# Altium PCB modFOC-MCU.PcbDoc (part 1 of 2)
Units mm, origin at the board's own origin, x right, y up, seen from the top; angles counter-clockwise.
Board outline 53.34 x 55.88 mm, 4 copper layers (Top Layer, Mid Layer 1, Mid Layer 2, Bottom Layer), stack 1.587 mm thick; 106 components, 96 nets, 421 pads, 189 vias.
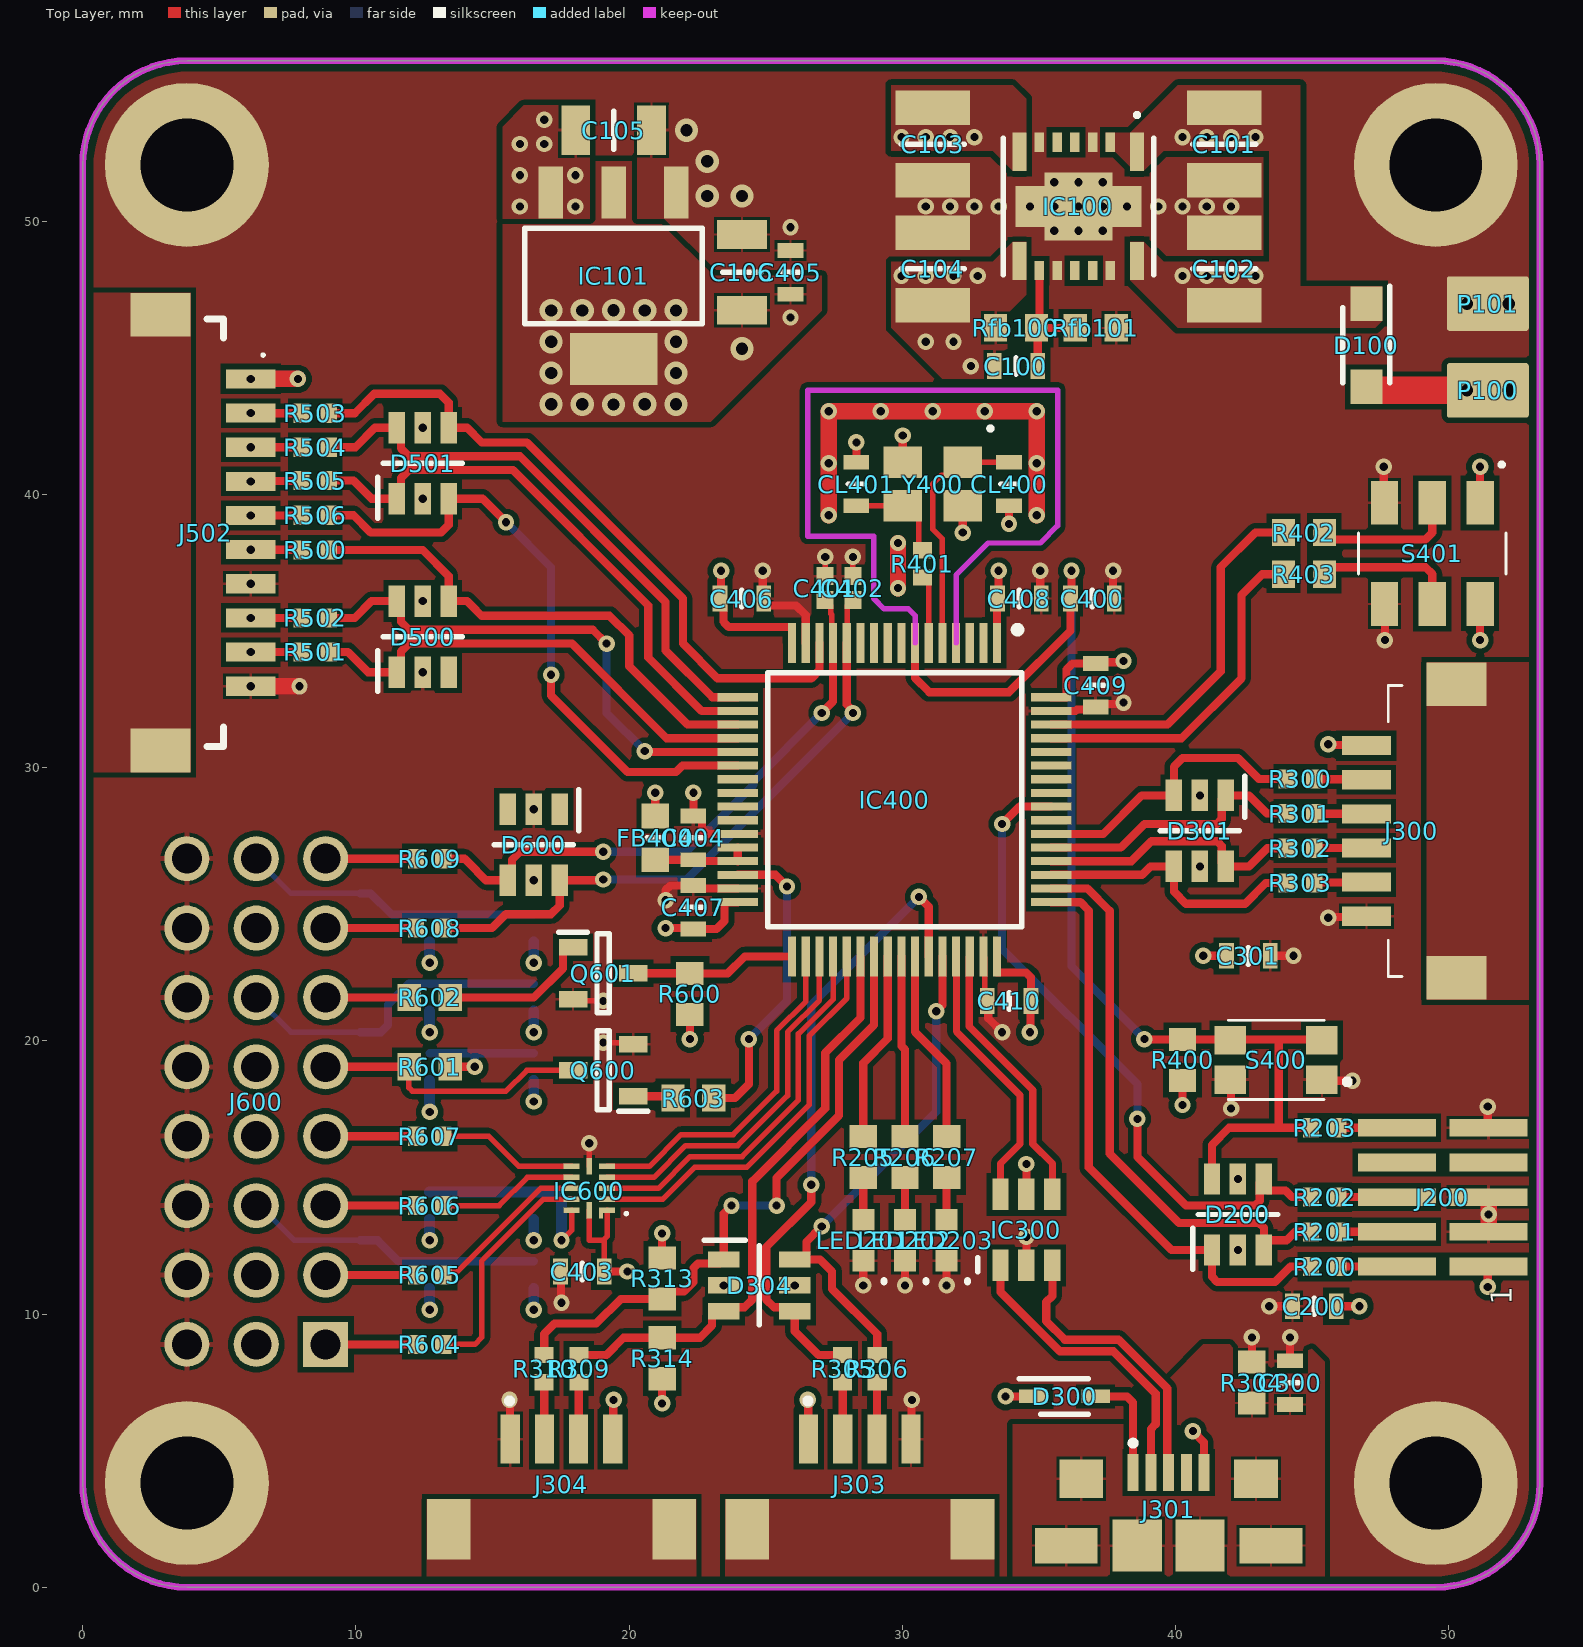
[diagram p0: Top Layer view]
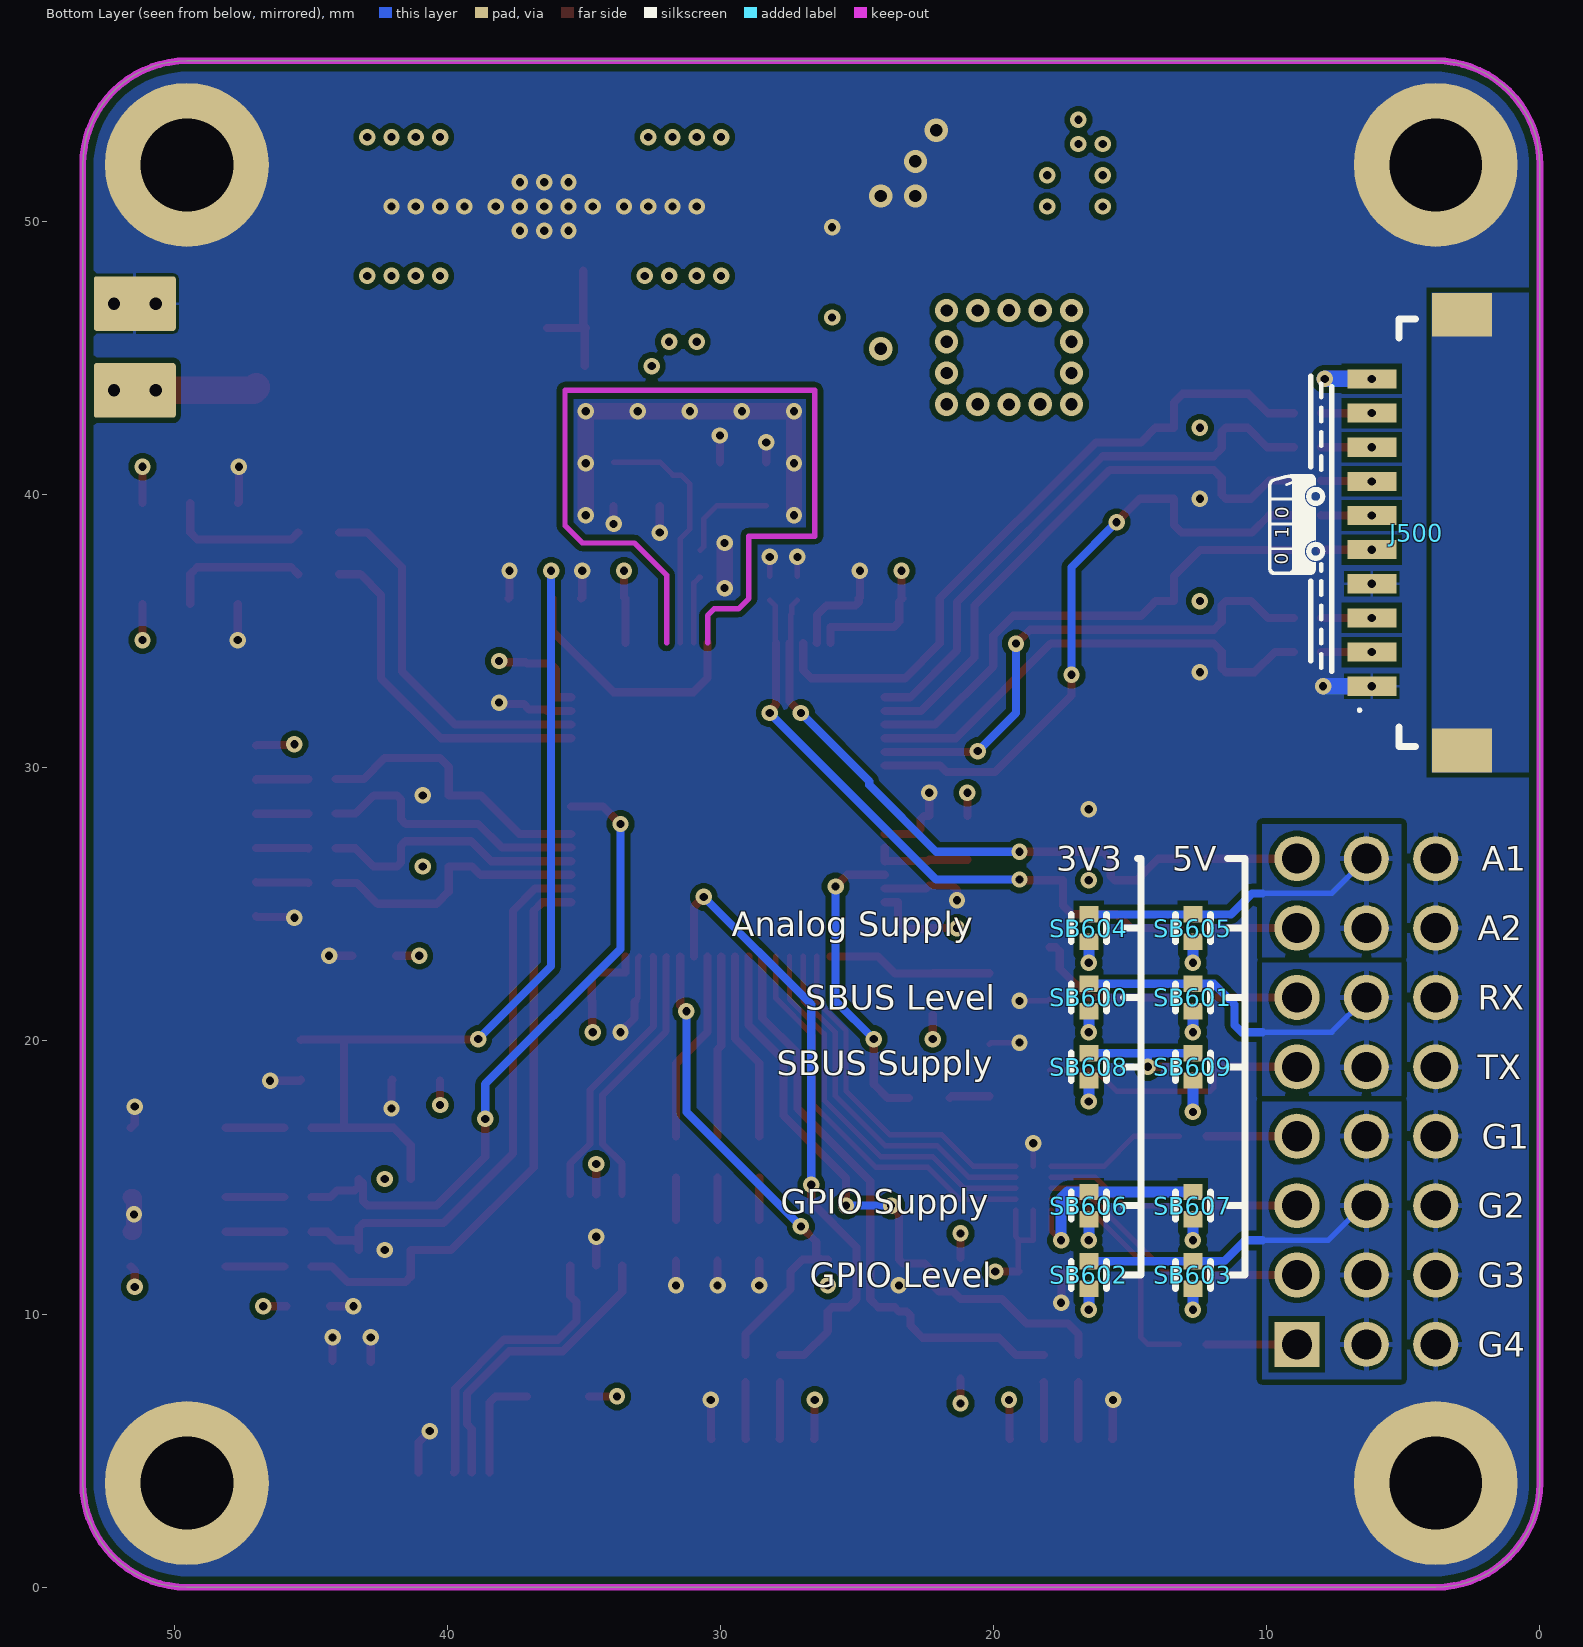
[diagram p1: Bottom Layer view, seen from below]
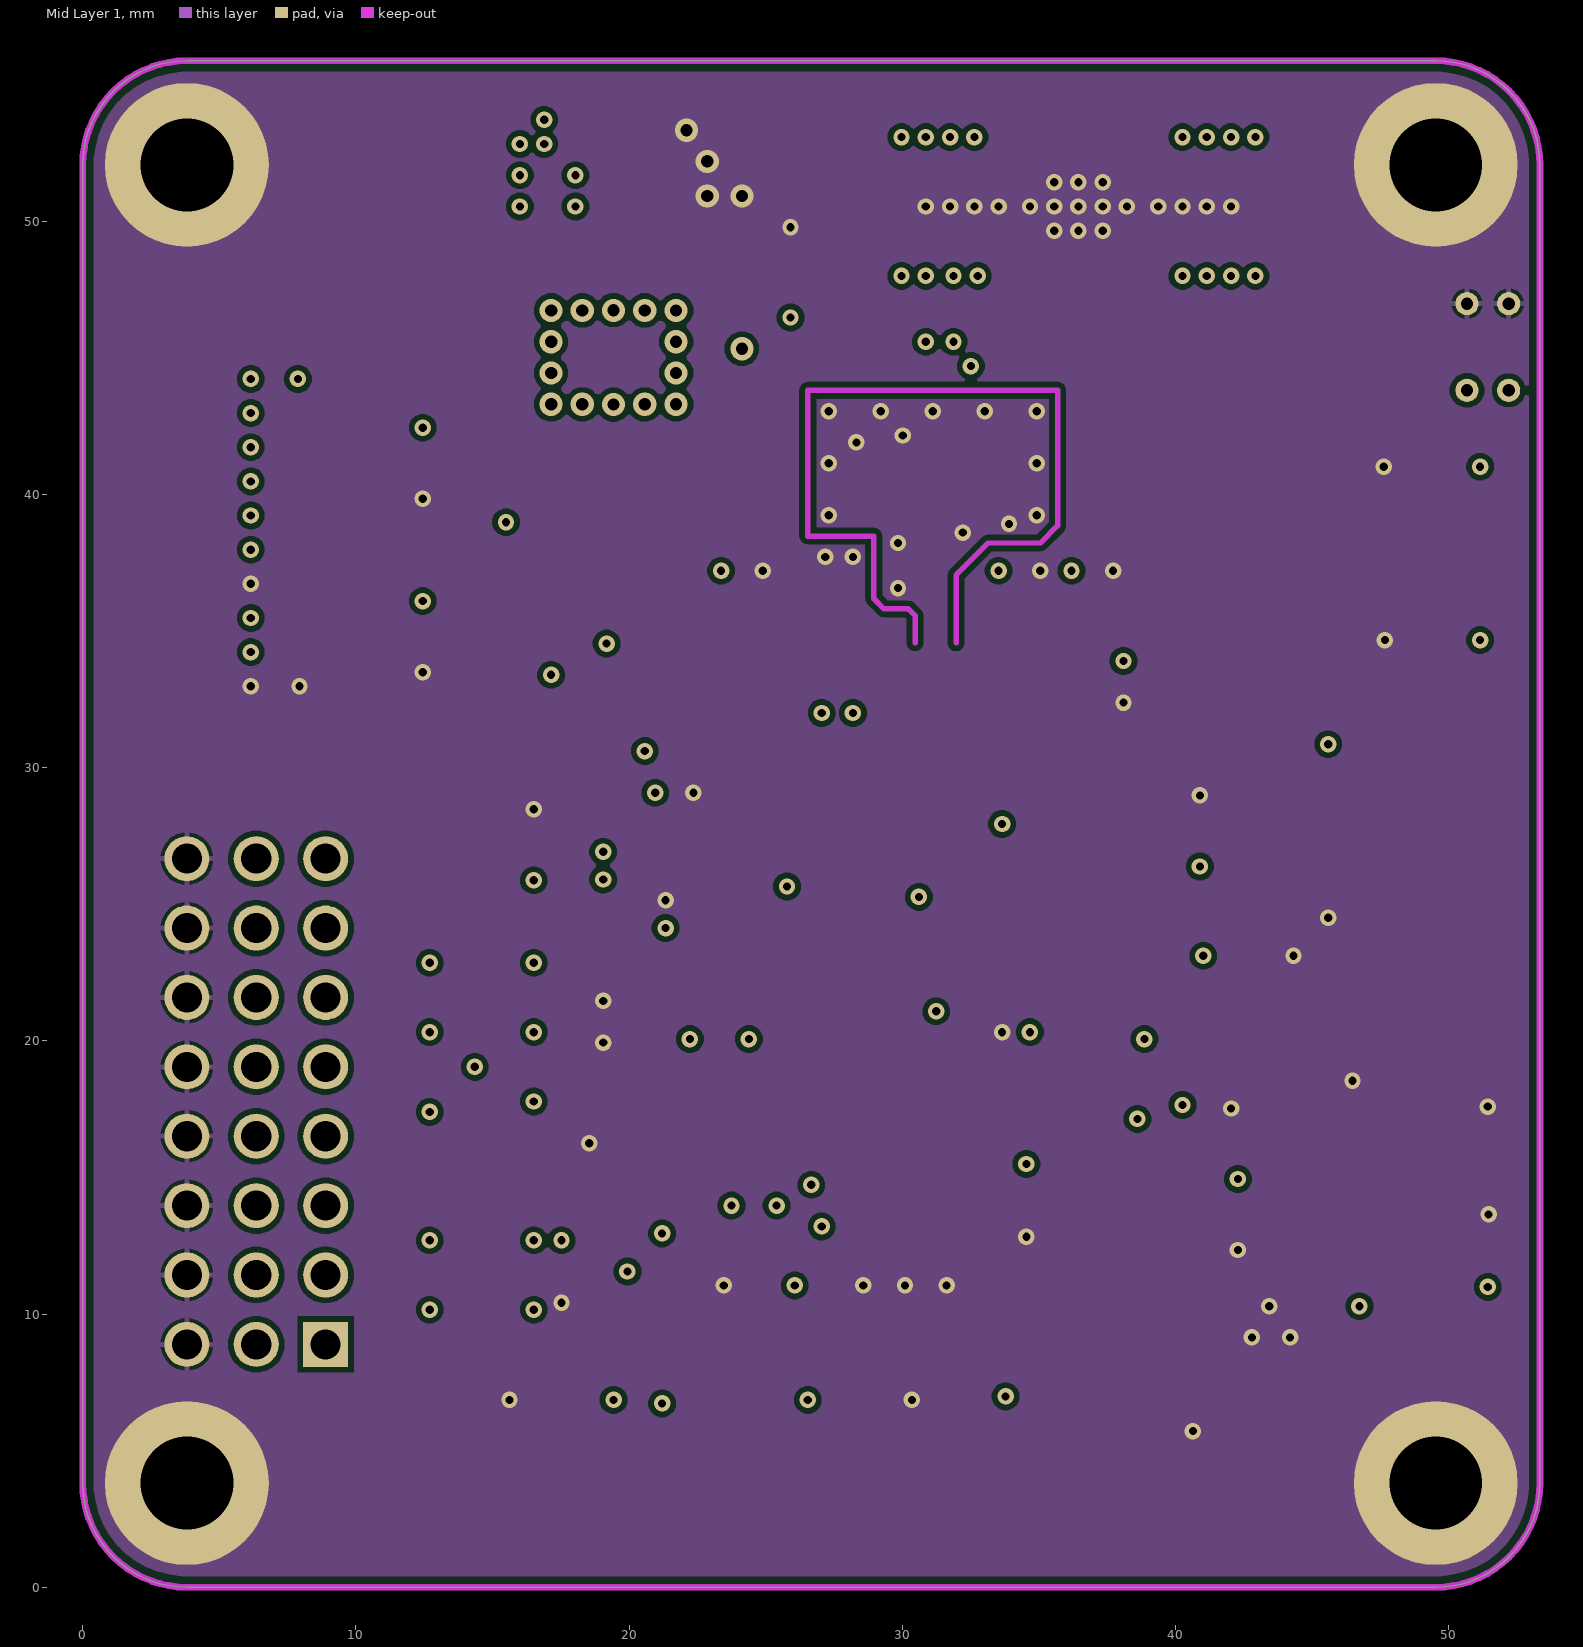
[diagram p2: Mid Layer 1]
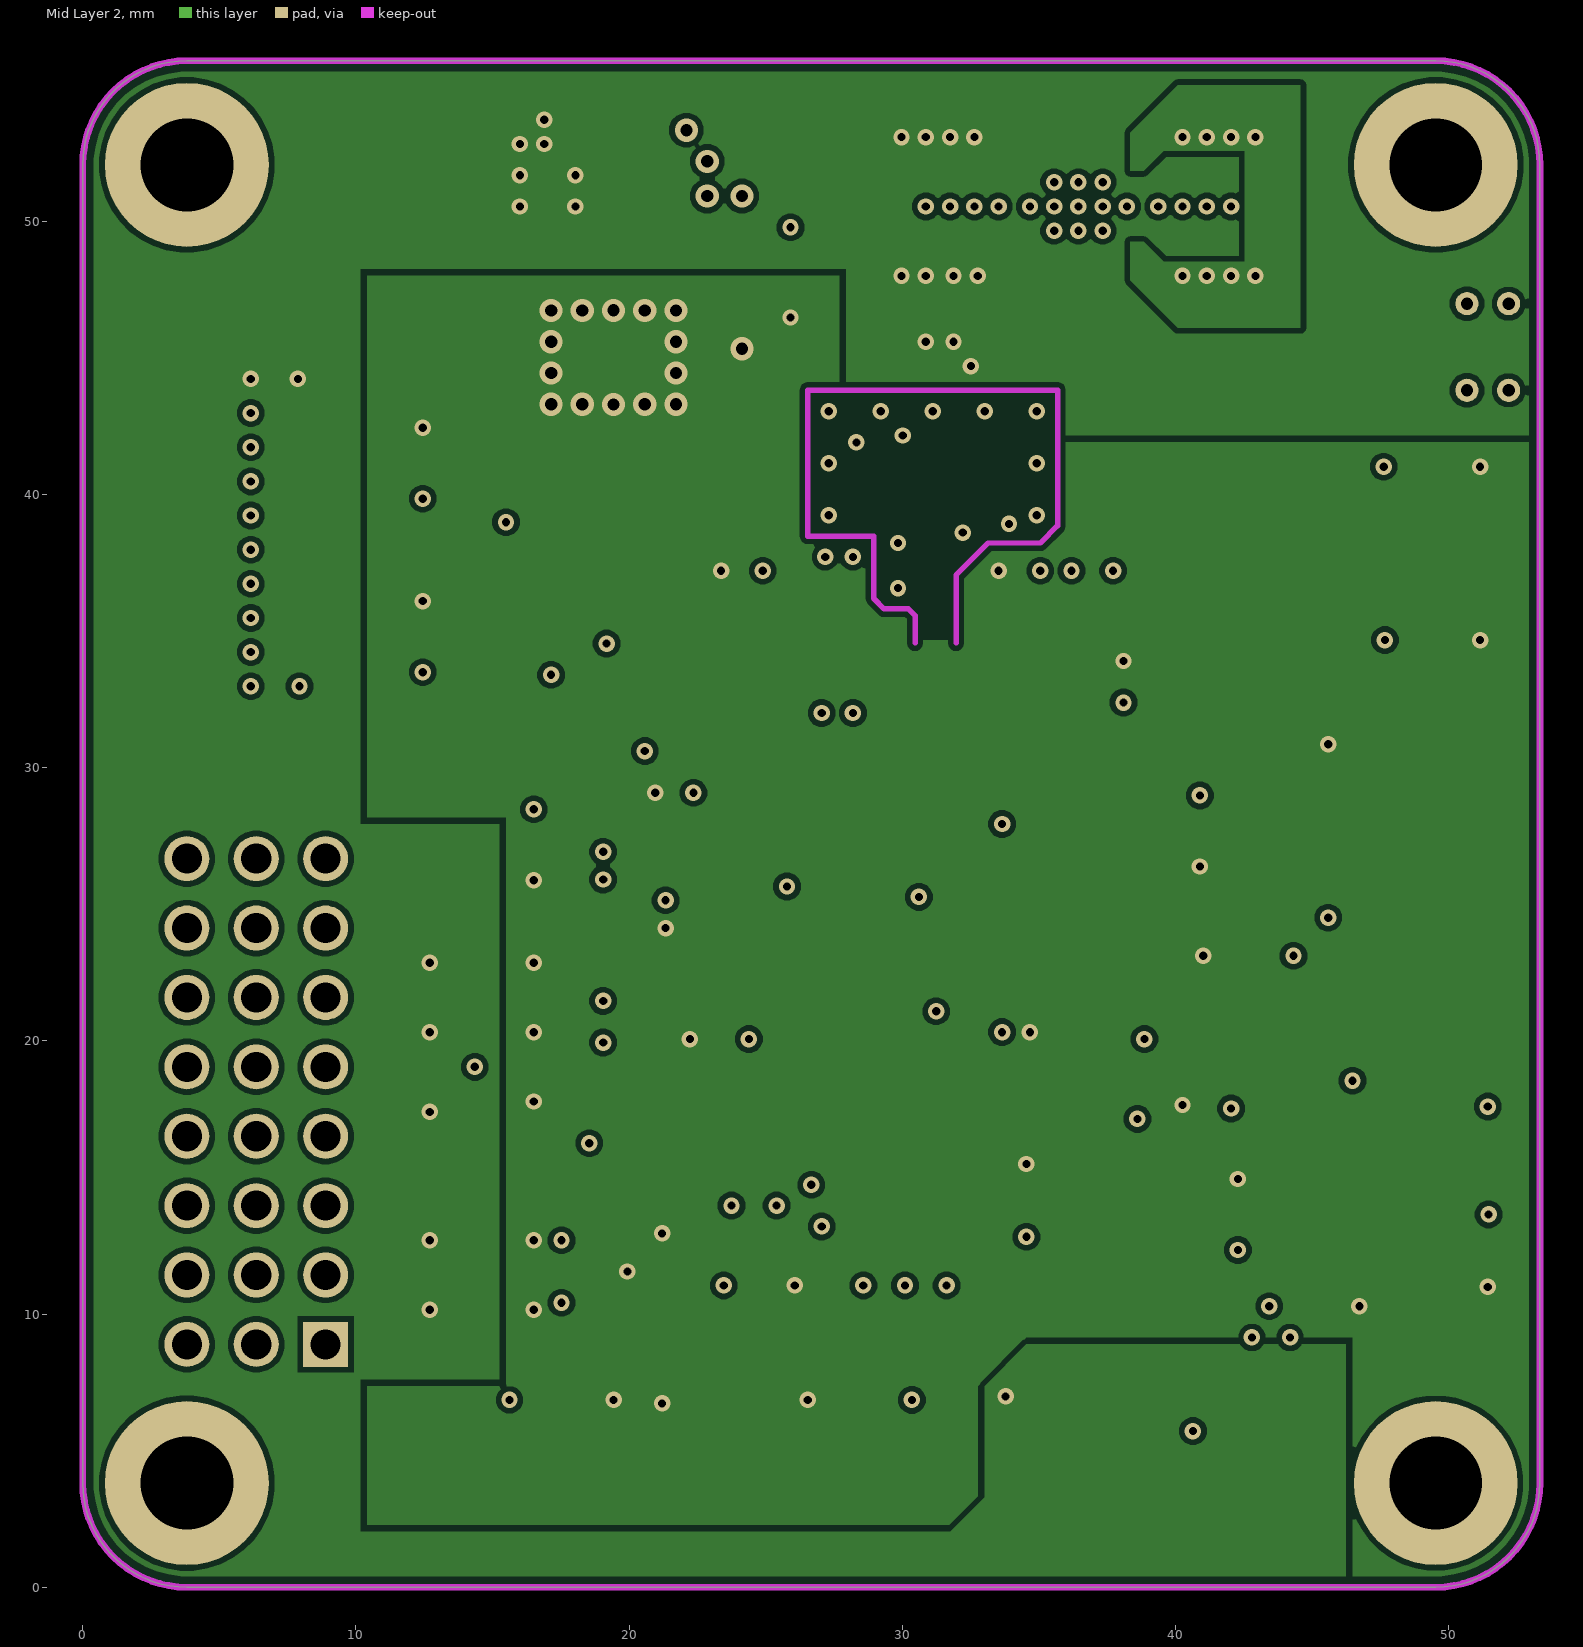
[diagram p3: Mid Layer 2]
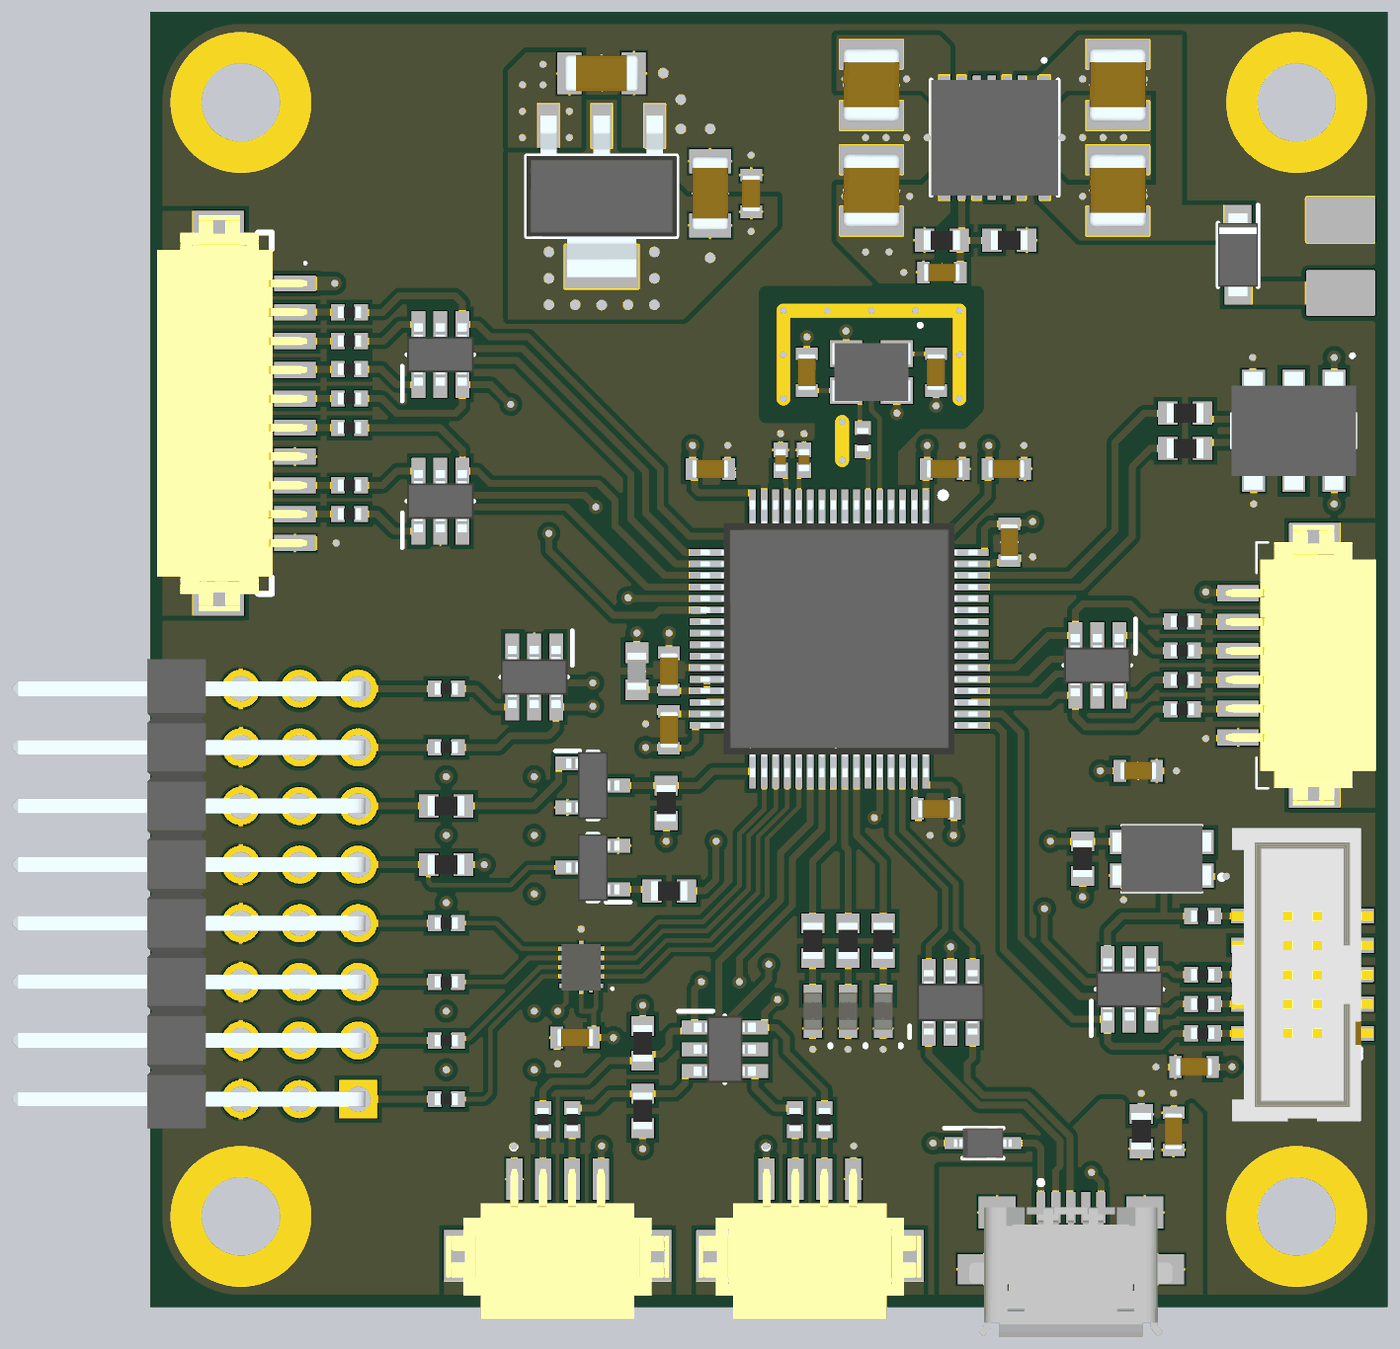
[diagram p4: 3D render of the assembled board from above, using the file's embedded part models]

## Layer stack, top to bottom
Top Solder: solder mask 0.0127, SM-001, Dk 3.8
Top Layer: signal copper 0.035
Dielectric 1: prepreg 0.2083, PP-022, Dk 4.6
Mid Layer 1: signal copper 0.0175
Core: core 1.065, Core-040, Dk 4.6
Mid Layer 2: signal copper 0.0175
Dielectric 2: prepreg 0.2083, PP-022, Dk 4.6
Bottom Layer: signal copper 0.035
Bottom Solder: solder mask 0.0127, SM-001, Dk 3.8

## Board outline
0,3.81 0,52.07 cw(c3.81,52.07) 3.81,55.88 49.53,55.88 cw(c49.53,52.07) 53.34,52.07 53.34,3.81 cw(c49.53,3.81) 49.53,0 3.81,0 cw(c3.81,3.81)

## Design rules (kind name [scope] priority, off if disabled: settings)
AcuteAngle [All] p1: minimum=6.00000000000000E+0001 checktracksonly=FALSE
BoardOutlineClearance [All] p1: gap=0.4 ignorepadtopadclearanceinfootprint=FALSE
Clearance [All] p1: gap=0.2 ignorepadtopadclearanceinfootprint=FALSE except(0.102: Arc-Text Track-Text SMDPad-THPad SMDPad-Text THPad-THPad THPad-Text Fill-Text Poly-Text Region-Text Text-Text; 0.127: Arc-Arc Arc-Track Track-Track SMDPad-SMDPad SMDPad-Via THPad-Via Via-Text; 0.25: Arc-Hole Track-Hole SMDPad-Hole THPad-Hole Via-Hole Fill-Hole Poly-Hole Region-Hole Text-Hole; 0.254: Arc-Via Track-Via Via-Via; 0.33: Arc-THPad Track-THPad)
ComponentClearance [All] p1: gap=0.102 collisioncheckmode=3 verticalgap=0.102 showdistances=TRUE
DiffPairsRouting DiffPairsRoutingUSB90R [InDifferentialPair('USB-MCU.USBD') Or InDifferentialPair('USB-CON_5')] p1: maxlimit=0.203 minlimit=0.102 mostfreqgap=0.203 toplayer_mingap=0.203 toplayer_minwidth=0.261 toplayer_maxwidth=0.261 toplayer_prefwidth=0.261 bottomlayer_mingap=0.203 bottomlayer_minwidth=0.261 bottomlayer_maxwidth=0.261 bottomlayer_prefwidth=0.261 impedanceprofiledriven=TRUE impedanceprofileid={FED37976-4A96-4117-917E-B578259A096B} impedanceprofilevalue=90.000000 maxuncoupledlength=12.7
Height [All] p1: minheight=0 maxheight=1816.048 prefheight=12.7
HoleSize [All] p1: absolutevalues=TRUE maxlimit=6.3 minlimit=0.3 maxpercent=80.000 minpercent=20.000
HoleToHoleClearance [All] p1: gap=0.5 allowstackedmicrovias=FALSE
MinimumAnnularRing [All] p1: minimumring=0.13
MinimumSolderMaskSliver [All] p1: minsoldermaskwidth=0.1
PlaneClearance [All] p1: clearance=0.102
PlaneConnect PlaneConnectPowerPads [InPadClass('PowerPads')] p1: planeconnectstyle=Direct reliefexpansion=0.508 reliefentries=4 reliefconductorwidth=0.254 reliefairgap=0.254
PlaneConnect [All] p2: pad.planeconnectstyle=Relief pad.reliefexpansion=0.3 pad.reliefentries=4 pad.reliefconductorwidth=0.102 pad.reliefairgap=0.102 via.planeconnectstyle=Direct via.reliefexpansion=0.3 via.reliefentries=4 via.reliefconductorwidth=0.127 via.reliefairgap=0.127
PolygonConnect PolygonConnectPowerPads [All vs (InPadClass('PowerPads'))] p1: connectstyle=Direct reliefconductorwidth=0.254 reliefentries=4 polygonreliefangle="90 Angle" airgapwidth=0.254
PolygonConnect [All] p2: thpad.connectstyle=Relief thpad.reliefconductorwidth=0.2 thpad.reliefentries=4 thpad.polygonreliefangle="90 Angle" thpad.airgapwidth=0.127 smdpad.connectstyle=Relief smdpad.reliefconductorwidth=0.102 smdpad.reliefentries=4 smdpad.polygonreliefangle="90 Angle" smdpad.airgapwidth=0.102 via.connectstyle=Direct via.reliefconductorwidth=0.127 via.reliefentries=4 via.polygonreliefangle="90 Angle" via.airgapwidth=0.127
RoutingVias [All] p1: holewidth=0.3 width=0.6 viastyle="Through Hole" minholewidth=0.2 minwidth=0.4 maxholewidth=10 maxwidth=10
SilkToSilkClearance [All] p1: silktosilkclearance=0
SilkToSolderMaskClearance [IsPad] p1: minsilkscreentomaskgap=0.15 clearancetoexposedcopper=TRUE
SolderMaskExpansion "SolderMaskExpansion Vias" [IsVia] p1: expansion=0.102 istentingtop=TRUE
SolderMaskExpansion [All] p2: expansion=0.05 istentingtop=FALSE
Width [All] p1: maxlimit=50 minlimit=0.2 preferedwidth=0.3
20 further rules are at their usual default settings.

## Classes and differential pairs
component class Designator: D600 IC600 J600 Q600 Q601 R600 R601 R602 R603 R604 R605 R606 R607 R608 R609 SB600 SB601 SB602 SB603 SB604 SB605 SB606 SB607 SB608 SB609
component class "ESC Interface": D500 D501 J500 J502 R500 R501 R502 R503 R504 R505 R506
component class "SWD and LED Debug": C200 D200 J200 LED1 LED2 LED3 LED4 LED201 LED202 LED203 R5 R6 R7 R8 R200 R201 R202 R203 R205 R206 R207
component class "STM32 MCU and Peripherals": C400 C401 C402 C403 C404 C405 C406 C407 C408 C409 C410 CL400 CL401 FB400 IC400 LED100 LED101 LED102 LED103 R400 R401 R402 R403 S400 S401 SW100 Y400
component class "modFOC Peripheral Interfaces": C300 C301 D300 D301 D304 IC300 J300 J301 J303 J304 R300 R301 R302 R303 R304 R305 R306 R309 R310 R313 R314
component class "Integrated Inductor Buck Supply": C100 C101 C102 C103 C104 C105 C106 D100 IC100 IC101 P100 P101 Rfb100 Rfb101
differential pair USB-MCU.USBD: +USB-MCU.USBD_P -USB-MCU.USBD_N
differential pair USB-CON: +USB-CON_P -USB-CON_N

## Components (designator, comment, footprint, x,y, rotation, side; value= is the part's Value field where it differs from the comment)
C100 "16pF 50V" CAPC1608X97N 34.163,44.704 r180 top
C101 "4.7uF 100V" CAPC3225X270N 41.783,52.832 r90 top
C102 "4.7uF 100V" CAPC3225X270N 41.783,48.26 r270 top
C103 "22uF 6.3V" CAPC3225X270N 31.115,52.832 r90 top
C104 "22uF 6.3V" CAPC3225X270N 31.115,48.26 r270 top
C105 "10uF 6.3V X7R" CAPC3216X180N 19.431,53.34 r180 top
C106 "10uF 6.3V X7R" CAPC3216X180N 24.13,48.133 r270 top
C200 "100nF 6.3V" CAPC1608X97N 45.085,10.287 r0 top
C300 "10nF 6.3V" CAPC1608X97N 44.196,7.493 r270 top
C301 "100nF 6.3V" CAPC1608X97N 42.672,23.114 r180 top
C400 "100nF 6.3V" CAPC1608X97N 36.957,36.195 r0 top
C401 "100nF 6.3V" CAPC1005X55N 27.178,36.576 r270 top
C402 "100nF 6.3V" CAPC1005X55N 28.194,36.576 r270 top
C403 "10nF 6.3V" CAPC1608X97N 18.288,11.557 r180 top
C404 "10nF 6.3V" CAPC1608X97N 22.352,27.432 r90 top
C405 "100nF 6.3V" CAPC1608X97N 25.908,48.133 r90 top
C406 "100nF 6.3V" CAPC1608X97N 24.13,36.195 r0 top
C407 "100nF 6.3V" CAPC1608X97N 22.352,24.892 r90 top
C408 "100nF 6.3V" CAPC1608X97N 34.29,36.195 r0 top
C409 "100nF 6.3V" CAPC1608X97N 37.084,33.02 r270 top
C410 "100nF 6.3V" CAPC1608X97N 33.909,21.463 r180 top
CL400 "4pF 6.3V" CAPC1608X97N 33.909,40.386 r90 top
CL401 "4pF 6.3V" CAPC1608X97N 28.321,40.386 r270 top
D100 "100V 2A" SOD-123FL 46.99,45.466 r270 top
D200 "ESDSUPPRESSOR" SOT23-6 42.287,13.645 r90 top
D300 "30V 1A" SOD-323 35.941,6.985 r0 top
D301 "ESDSUPPRESSOR" SOT23-6 40.894,27.686 r270 top
D304 "ESDSUPPRESSOR" SOT23-6 24.765,11.049 r0 top
D500 "ESDSUPPRESSOR" SOT23-6 12.446,34.798 r90 top
D501 "ESDSUPPRESSOR" SOT23-6 12.446,41.148 r90 top
D600 "ESDSUPPRESSOR" SOT23-6 16.51,27.178 r270 top
FB400 "220R @ 100MHz" FB0603 20.955,27.432 r270 top
IC100 "TPSM5601R5HSRDAR" TPSM5601R5HSRDAR 36.449,50.546 r270 top
IC101 "3V3 >800mA" SOT230P700X180-4N 19.431,48.006 r270 top
IC300 "USBLC6-2SC6" SOT95P280X145-6N 34.544,13.081 r90 top
IC400 "STM32G474RBT6" QFP50P1200X1200X160-64N 29.718,28.829 r270 top locked
IC600 "TXB0104RUTR" TXB0104RUTR 18.542,14.605 r90 top
J200 "SWD Connector" HUSSP10W40P127_2X5_635X340X420P 49.78,14.28 r90 top
J300 "DF13A-6P-1.25H_21_" DF13A6P125H21 50.292,27.686 r270 top
J301 "1981584-1" 19815841 39.751,1.524 r0 top
J303 "DF13A-4P-1.25H_21_" DF13A4P125H21 28.448,2.921 r180 top
J304 "DF13A-4P-1.25H_21_" DF13A4P125H21 17.526,2.921 r180 top
J500 "DF13A-10P-1.25H_21_" DF13A10P125H21 3.15,38.608 r270 bottom locked
J502 "DF13A-10P-1.25H_21_" DF13A10P125H21 3.15,38.608 r90 top locked
J600 "TSW-108-08-G-T-RA" HDRRA24W64P254_3X8_2032X254X812P 8.89,8.89 r90 top locked
LED201 "Green" CHIPLED_0603 28.575,12.7 r90 top
LED202 "Green" CHIPLED_0603 30.099,12.7 r90 top
LED203 "Green" CHIPLED_0603 31.623,12.7 r90 top
P100 "PowerPad" POWER_PAD_S 51.435,43.815 r180 top
P101 "PowerPad" POWER_PAD_S 51.435,46.99 r180 top
Q600 "BC847A" SOT95P230X110-3N 19.05,18.923 r180 top
Q601 "BC847A" SOT95P230X110-3N 19.05,22.479 r0 top
R200 "100R" RESC1005X40N 45.462,11.74 r180 top
R201 "100R" RESC1005X40N 45.462,13.01 r180 top
R202 "100R" RESC1005X40N 45.462,14.28 r180 top
R203 "100R" RESC1005X40N 45.462,16.82 r180 top
R205 "1k" RESC1608X50N 28.575,15.748 r270 top
R206 "1k" RESC1608X50N 30.099,15.748 r270 top
R207 "1k" RESC1608X50N 31.623,15.748 r270 top
R300 "100R" RESC1005X40N 44.577,29.591 r0 top
R301 "100R" RESC1005X40N 44.577,28.321 r0 top
R302 "100R" RESC1005X40N 44.577,27.051 r0 top
R303 "100R" RESC1005X40N 44.577,25.781 r0 top
R304 "1M" RESC1608X50N 42.799,7.493 r270 top
R305 "100R" RESC1005X40N 27.813,8.001 r270 top
R306 "100R" RESC1005X40N 29.083,8.001 r270 top
R309 "100R" RESC1005X40N 18.161,8.001 r270 top
R310 "100R" RESC1005X40N 16.891,8.001 r270 top
R313 "10k" RESC1608X50N 21.209,11.303 r270 top
R314 "10k" RESC1608X50N 21.209,8.382 r90 top
R400 "10k" RESC1608X50N 40.259,19.304 r90 top
R401 "22R" RESC1005X40N 30.734,37.465 r270 top
R402 "10k" RESC1608X50N 44.704,38.608 r180 top
R403 "10k" RESC1608X50N 44.704,37.084 r180 top
R500 "100R" RESC1005X40N 8.509,37.973 r180 top locked
R501 "100R" RESC1005X40N 8.509,34.239 r180 top locked
R502 "100R" RESC1005X40N 8.509,35.484 r180 top locked
R503 "100R" RESC1005X40N 8.509,42.977 r180 top locked
R504 "100R" RESC1005X40N 8.509,41.732 r180 top locked
R505 "100R" RESC1005X40N 8.509,40.513 r180 top locked
R506 "100R" RESC1005X40N 8.509,39.243 r180 top locked
R600 "10k" RESC1608X50N 22.225,21.717 r270 top
R601 "10k" RESC1608X50N 12.7,19.05 r0 top
R602 "1k" RESC1608X50N 12.7,21.59 r180 top
R603 "1k" RESC1608X50N 22.352,17.907 r0 top
R604 "100R" RESC1005X40N 12.7,8.89 r180 top
R605 "100R" RESC1005X40N 12.7,11.43 r180 top
R606 "100R" RESC1005X40N 12.7,13.97 r180 top
R607 "100R" RESC1005X40N 12.7,16.51 r180 top
R608 "100R" RESC1005X40N 12.7,24.13 r180 top
R609 "100R" RESC1005X40N 12.7,26.67 r180 top
Rfb100 "100k 1%" RESC1608X50N 34.163,46.101 r180 top
Rfb101 "24.9k 1%" RESC1608X50N 37.084,46.101 r180 top
S400 "434153017835" 434153017835 43.688,19.304 r180 top
S401 "CAS-D20A1" CASD20A1 49.403,37.846 r180 top
SB600 "Solder Bridge" SB0402 16.51,21.59 r270 bottom
SB601 "Solder Bridge" SB0402 12.7,21.59 r270 bottom
SB602 "Solder Bridge" SB0402 16.51,11.43 r270 bottom
SB603 "Solder Bridge" SB0402 12.7,11.43 r270 bottom
SB604 "Solder Bridge" SB0402 16.51,24.13 r270 bottom
SB605 "Solder Bridge" SB0402 12.7,24.13 r270 bottom
SB606 "Solder Bridge" SB0402 16.51,13.97 r270 bottom
SB607 "Solder Bridge" SB0402 12.7,13.97 r270 bottom
SB608 "Solder Bridge" SB0402 16.51,19.05 r270 bottom
SB609 "Solder Bridge" SB0402 12.7,19.05 r270 bottom
Y400 "16Mhz 8pF" ABM8W160000MHZ8B1UT3 31.115,40.386 r180 top

## Footprints (in the part's own frame and the unit in brackets; to place one, negate y for a bottom-side part, rotate by r counter-clockwise, add the part's x,y. Pads: shape width x height; smd on the part's side, far side on the other; paste and mask are expansions set on the pad)
19815841 [mm]
  rect 0.4x1.35 smd: 1(-1.3,2.675) 2(-0.65,2.675) 3(0,2.675) 4(0.65,2.675) 5(1.3,2.675)
  rect 1.6x1.4 smd: 6(-3.2,2.45) 7(3.2,2.45)
  rect 2.3x1.3 smd: 8(-3.75,0) 9(3.75,0)
  rect 1.8x1.9 smd: 10(-1.15,0) 11(1.15,0)
  silkscreen extent -1.4,3.65 -1.2,3.85, body extent -4.4,-2.93 4.4,2.68, height 2.8
434153017835 [mm]
  rect 1.15x1.05 smd: 1(-1.675,0.725) 2(-1.675,-0.725) 3(1.675,-0.725) 4(1.675,0.725)
  silkscreen extent -2.7,-1.45 1.75,1.45, body extent -2.14,-1.45 2.14,1.45, height 1.1
ABM8W160000MHZ8B1UT3 [mm]
  rect 1.4x1.15 smd: 1(-1.1,-0.8) 2(1.1,-0.8) 3(1.1,0.8) 4(-1.1,0.8)
  silkscreen extent -2.16,-2.08 -2.06,-1.98, body extent -1.69,-1.26 1.69,1.26, height 0.85
CAPC1005X55N [mm]
  rect 0.65x0.62 smd: 1(-0.44,0) 2(0.44,0)
  body extent -0.5,-0.25 0.5,0.25, height 0.55
CAPC1608X97N [mm]
  rect 0.54x0.94 smd: 1(-0.8,0) 2(0.8,0)
  silkscreen extent 0,-0.3 0,0.3, body extent -0.8,-0.4 0.8,0.4, height 0.9
CAPC3216X180N [mm]
  rect 1.05x1.82 smd: 1(-1.39,0) 2(1.39,0)
  silkscreen extent 0,-0.7 0,0.7, body extent -1.6,-0.8 1.6,0.8, height 1.8
CAPC3225X270N [mm]
  rect 1.26x2.72 smd: 1(-1.33,0) 2(1.33,0)
  silkscreen extent 0,-1.15 0,1.15, body extent -1.6,-1.25 1.6,1.25, height 2.7
CASD20A1 [mm]
  rect 1x1.6 smd: 1(-1.75,-1.85) 2(0,-1.85) 3(1.75,-1.85) 4(-1.75,1.85) 5(0,1.85) 6(1.75,1.85)
  silkscreen extent -2.7,-3.3 2.7,0.75, body extent -2.7,-2.55 2.7,2.55, height 2.6
CHIPLED_0603 [mm]
  rect 0.8x0.8 smd: 1(-0.75,0) 2(0.75,0)
  silkscreen extent -1.52,-0.76 -1.47,-0.76, body extent -0.8,-0.4 0.8,0.4, height 0.5
DF13A4P125H21 [mm]
  rect 0.7x1.8 smd: 1(1.875,-2.5) 2(0.625,-2.5) 3(-0.625,-2.5) 4(-1.875,-2.5)
  rect 1.6x2.2 smd: MP1(-4.125,0.8) MP2(4.125,0.8)
  silkscreen extent 1.8,-4 2,-3.8, body extent -4.82,-2.94 4.82,3.56, height 3.68
DF13A6P125H21 [mm]
  rect 0.7x1.8 smd: 1(-3.125,-3.3) 2(-1.875,-3.3) 3(-0.625,-3.3) 4(0.625,-3.3) 5(1.875,-3.3) 6(3.125,-3.3)
  rect 1.6x2.2 smd: MP1(-5.375,0) MP2(5.375,0)
  silkscreen extent -5.33,-2.5 5.33,-2, body extent -6.07,-3.83 6.07,2.67, height 3.68
DF13A10P125H21 [mm]
  rect 0.7x1.8 smd: 1(5.625,-3) 2(4.375,-3) 3(3.125,-3) 4(1.875,-3) 5(0.625,-3) 6(-0.625,-3) 7(-1.875,-3) 8(-3.125,-3) 9(-4.375,-3) 10(-5.625,-3)
  rect 1.6x2.2 smd: MP1(-7.975,0.3) MP2(7.975,0.3)
  silkscreen extent -7.82,-3.5 7.82,-1.4, body extent -8.57,-3.53 8.57,2.97, height 3.58
FB0603 [mm]
  rect 0.9x1 smd: 1(-0.8,0) 2(0.8,0)
  silkscreen extent 0,-0.3 0,0.3, body extent -0.8,-0.4 0.8,0.4, height 0.75
HDRRA24W64P254_3X8_2032X254X812P [mm]
  rect 1.65x1.65 hole 1.1: 1(0,0)
  round 1.65 hole 1.1: 2(0,2.54) 3(0,5.08) 4(2.54,0) 5(2.54,2.54) 6(2.54,5.08) 7(5.08,0) 8(5.08,2.54) 9(5.08,5.08) 10(7.62,0) 11(7.62,2.54) 12(7.62,5.08) 13(10.16,0) 14(10.16,2.54) 15(10.16,5.08) 16(12.7,0) 17(12.7,2.54) 18(12.7,5.08) 19(15.24,0) 20(15.24,2.54) 21(15.24,5.08) 22(17.78,0) 23(17.78,2.54) 24(17.78,5.08)
  body extent -1.27,-0.32 19.05,14.98, height 8.12
HUSSP10W40P127_2X5_635X340X420P [mm]
  rect 0.65x2.85 smd: 1(-2.54,-1.675) 2(-2.54,1.675) 3(-1.27,-1.675) 4(-1.27,1.675) 5(0,-1.675) 6(0,1.675) 7(1.27,-1.675) 8(1.27,1.675) 9(2.54,-1.675) 10(2.54,1.675)
  body extent -6.35,-3.05 6.35,3.05, height 5.33
POWER_PAD_S [mm]
  round 0.85 hole 0.45: 1(-0.762,0) 1(0.762,0)
  rrect10% 3x2 smd: 1(0,0)
  rrect10% 3x2 smd far side: 1(0,0)
QFP50P1200X1200X160-64N [mm]
  rect 1.475x0.298 smd: 1(-5.738,3.75) 2(-5.738,3.25) 3(-5.738,2.75) 4(-5.738,2.25) 5(-5.738,1.75) 6(-5.738,1.25) 7(-5.738,0.75) 8(-5.738,0.25) 9(-5.738,-0.25) 10(-5.738,-0.75) 11(-5.738,-1.25) 12(-5.738,-1.75) 13(-5.738,-2.25) 14(-5.738,-2.75) 15(-5.738,-3.25) 16(-5.738,-3.75) 33(5.738,-3.75) 34(5.738,-3.25) 35(5.738,-2.75) 36(5.738,-2.25) 37(5.738,-1.75) 38(5.738,-1.25) 39(5.738,-0.75) 40(5.738,-0.25) 41(5.738,0.25) 42(5.738,0.75) 43(5.738,1.25) 44(5.738,1.75) 45(5.738,2.25) 46(5.738,2.75) 47(5.738,3.25) 48(5.738,3.75)
  rect 0.298x1.475 smd: 17(-3.75,-5.738) 18(-3.25,-5.738) 19(-2.75,-5.738) 20(-2.25,-5.738) 21(-1.75,-5.738) 22(-1.25,-5.738) 23(-0.75,-5.738) 24(-0.25,-5.738) 25(0.25,-5.738) 26(0.75,-5.738) 27(1.25,-5.738) 28(1.75,-5.738) 29(2.25,-5.738) 30(2.75,-5.738) 31(3.25,-5.738) 32(3.75,-5.738) 49(3.75,5.738) 50(3.25,5.738) 51(2.75,5.738) 52(2.25,5.738) 53(1.75,5.738) 54(1.25,5.738) 55(0.75,5.738) 56(0.25,5.738) 57(-0.25,5.738) 58(-0.75,5.738) 59(-1.25,5.738) 60(-1.75,5.738) 61(-2.25,5.738) 62(-2.75,5.738) 63(-3.25,5.738) 64(-3.75,5.738)
  silkscreen extent -6.35,-4.65 4.65,4.65, body extent -6,-6 6,6, height 1.6
RESC1005X40N [mm]
  rect 0.6x0.7 smd: 1(-0.5,0) 2(0.5,0)
  body extent -0.5,-0.25 0.5,0.25, height 0.4
RESC1608X50N [mm]
  rect 0.85x1 smd: 1(-0.75,0) 2(0.75,0)
  body extent -0.79,-0.43 0.79,0.43, height 0.5
SB0402 [mm]
  rect 0.6x0.7 smd: 1(-0.5,0) 2(0.5,0)
  silkscreen extent -0.5,-0.64 0.5,0.64
SOD-123FL [mm]
  rect 1.26x1.17 smd: 1(-1.525,0) 2(1.525,0)
  silkscreen extent -2.15,-0.86 1.38,0.86, body extent -1.8,-0.86 1.8,0.86, height 1.08
SOD-323 [mm]
  rect 1.05x0.5 smd: 1(-1.138,0) 2(1.138,0)
  silkscreen extent -1.66,-0.65 0.87,0.65, body extent -1.25,-0.65 1.25,0.65, height 1.1
SOT23-6 [mm]
  rect 1.15x0.6 smd: 1(-1.3,0.95) 2(-1.3,0) 3(-1.3,-0.95) 4(1.3,-0.95) 5(1.3,0) 6(1.3,0.95)
  silkscreen extent -2.01,-1.45 0,1.65, body extent -1.35,-1.45 1.35,1.45, height 1.45
SOT95P230X110-3N [mm]
  rect 1.05x0.6 smd: 1(-1.1,0.95) 2(-1.1,-0.95) 3(1.1,0)
  silkscreen extent -1.63,-1.45 0.23,1.5, body extent -1.15,-1.45 1.15,1.45, height 1.1
SOT95P280X145-6N [mm]
  rect 1.15x0.6 smd: 1(-1.3,0.95) 2(-1.3,0) 3(-1.3,-0.95) 4(1.3,-0.95) 5(1.3,0) 6(1.3,0.95)
  silkscreen extent -1.52,1.78 -1.02,1.78, body extent -1.4,-1.46 1.4,1.46, height 1.45
SOT230P700X180-4N [mm]
  rect 1.9x0.9 smd: 1(-3.05,2.3) 2(-3.05,0) 3(-3.05,-2.3)
  rect 1.9x3.2 smd: 4(3.05,0)
  silkscreen extent -1.75,-3.25 1.75,3.25, body extent -3.5,-3.25 3.5,3.25, height 1.8
TPSM5601R5HSRDAR [mm]
  rect 1.4x0.5 smd: 1(-2,2.145) 7(-2,-2.155) 8(2,-2.155) 14(2,2.145)
  rect 0.7x0.35 smd: 2(-2.35,1.17) 3(-2.35,0.52) 4(-2.35,-0.13) 5(-2.35,-0.78) 6(-2.35,-1.43) 9(2.35,-1.43) 10(2.35,-0.78) 11(2.35,-0.13) 12(2.35,0.52) 13(2.35,1.17)
  rect 2.5x2.5 smd: 15(0,0)
  rect 1.5x1.05 smd: 16(0,-1.775) 17(0,1.775)
  silkscreen extent -3.4,-2.75 2.5,2.75, body extent -2.5,-2.75 2.5,2.75, height 4.2
TXB0104RUTR [mm]
  rect 0.2x0.6 smd: 1(-0.8,-0.65) 2(-0.4,-0.65) 3(0,-0.65) 4(0.4,-0.65) 5(0.8,-0.65) 7(0.8,0.65) 8(0.4,0.65) 9(0,0.65) 10(-0.4,0.65) 11(-0.8,0.65)
  rect 0.6x0.2 smd: 6(0.8,0) 12(-0.8,0)
  rect 0.2x0.15 smd: 13(-1,-0.425)
  silkscreen extent -0.98,-1.4 -0.88,-1.3, body extent -1,-0.85 1,0.85, height 0.55

## Part data
C100 C200 C300 C301 C400 C403 C404 C405 C406 C407 C408 C409 C410 CL400 CL401: library part C0603, "Capacitor", Height=0.97
C101 C102 C103 C104: library part C1210, "Capacitor", Height=0.97mm
C105 C106: library part C1206, "Capacitor", Height=1.8mm
C401 C402: library part C0402, "Capacitor"
D100 D300: library part SCHOTTKY-DIODE, "Schottky Diode"
D200 D301 D304 D500 D501 D600: "TVS Diode Array", Height=0.6mm
FB400: library part FB0603, "Ferrite Bead", Height=0.75mm
IC100: "Integrated Circuit", Manufacturer_Name="Texas Instruments", Mouser Part Number=595-TPSM5601R5HSRDAR, Arrow Part Number=TPSM5601R5HSRDAR, Arrow Price/Stock=https://www.arrow.com/en/products/tpsm5601r5hsrdar/texas-instruments?region=nac, Datasheet Link=https://www.ti.com/lit/ds/symlink/tpsm5601r5h.pdf?ts=1622688238120&ref_url=https%253A%252F%252Fcomponentsearchengine.com%252F, Height=4.1mm, Manufacturer_Part_Number=TPSM5601R5HSRDAR, Mouser Price/Stock=https://www.mouser.co.uk/ProductDetail/Texas-Instruments/TPSM5601R5HSRDAR?qs=DRkmTr78QARQPwPAx4O%252BKQ%3D%3D
IC101: library part LDO-SOT223, "LDO"
IC300: "Integrated Circuit", Manufacturer_Name=STMicroelectronics, Mouser Part Number=511-USBLC6-2SC6, Arrow Part Number=USBLC6-2SC6, Arrow Price/Stock=https://www.arrow.com/en/products/usblc6-2sc6/stmicroelectronics, Datasheet Link=http://www.st.com/st-web-ui/static/active/en/resource/technical/document/datasheet/CD00050750.pdf, Height=1.45mm, Manufacturer_Part_Number=USBLC6-2SC6, Mouser Price/Stock=https://www.mouser.co.uk/ProductDetail/STMicroelectronics/USBLC6-2SC6?qs=po45yt2pPpu%2FhNIlwQdTlg%3D%3D
IC400: "Integrated Circuit", Manufacturer_Name=STMicroelectronics, Mouser Part Number=511-STM32G474RBT6, Datasheet Link=https://www.mouser.com/datasheet/2/389/stm32g474cb-1600828.pdf, Height=1.6mm, Manufacturer_Part_Number=STM32G474RBT6, Mouser Price/Stock=https://www.mouser.co.uk/ProductDetail/STMicroelectronics/STM32G474RBT6?qs=uwxL4vQweFP0uAZUZXLBhQ%3D%3D
IC600: "Integrated Circuit", Manufacturer_Name="Texas Instruments", Mouser Part Number=595-TXB0104RUTR, Arrow Part Number=TXB0104RUTR, Arrow Price/Stock=https://www.arrow.com/en/products/txb0104rutr/texas-instruments?region=nac, Datasheet Link=http://www.ti.com/lit/gpn/txb0104, Height=0.55mm, Manufacturer_Part_Number=TXB0104RUTR, Mouser Price/Stock=https://www.mouser.co.uk/ProductDetail/Texas-Instruments/TXB0104RUTR?qs=EuM%2FBx4ov4Sspadi61aUCA%3D%3D
J200: library part M50-3600542R, "Connector", Manufacturer_Name=Harwin, Mouser Part Number=855-M50-3600542R, Datasheet Link=https://cdn.harwin.com/pdfs/M50-360R.pdf, Manufacturer_Part_Number=M50-3600542R, Mouser Price/Stock=https://www.mouser.co.uk/ProductDetail/Harwin/M50-3600542R?qs=DVxm2sPGGrrPu%2FxuhpV3yw%3D%3D
J300: "Connector", Arrow Part Number=DF13A-6P-1.25H(21), Manufacturer_Name=Hirose, Mouser Part Number=798-DF13A6P125H21, Arrow Price/Stock=https://www.arrow.com/en/products/df13a-6p-1.25h-21/hirose-electric, Datasheet Link=https://www.hirose.com/product/download/?distributor=digikey&type=2d&lang=en&num=DF13A-6P-1.25H(21), Height=3.75mm, Manufacturer_Part_Number=DF13A-6P-1.25H(21), Mouser Price/Stock=https://www.mouser.co.uk/ProductDetail/Hirose-Connector/DF13A-6P-125H21?qs=XQjbzJWzFPXnreVi%252BPl0Lg%3D%3D
J301: "Connector", Manufacturer_Name="TE Connectivity", Mouser Part Number=571-1981584-1, Arrow Part Number=1981584-1, Arrow Price/Stock=https://www.arrow.com/en/products/1981584-1/te-connectivity, Datasheet Link=http://www.te.com/commerce/DocumentDelivery/DDEController?Action=showdoc&DocId=Customer+Drawing%7F1981584%7FD2%7Fpdf%7FEnglish%7FENG_CD_1981584_D2.pdf%7F1981584-1, Height=3mm, Manufacturer_Part_Number=1981584-1, Mouser Price/Stock=https://www.mouser.co.uk/ProductDetail/TE-Connectivity/1981584-1?qs=ozkTL%2FUej0TLYxjQLPnd2Q%3D%3D
J303 J304: "Connector", Manufacturer_Name=Hirose, Manufacturer_Part_Number=DF13A-4P-1.25H(21), Mouser Part Number=798-DF13A4P125H21, Datasheet Link=https://componentsearchengine.com/Datasheets/1/DF13A-4P-1.25H(21).pdf, Height=3.6mm, Mouser Price/Stock=https://www.mouser.co.uk/ProductDetail/Hirose-Connector/DF13A-4P-125H21?qs=XQjbzJWzFPXWzMShI70F0w%3D%3D
J500 J502: "10Pin DF13 Connector", Arrow Part Number=DF13A-10P-1.25H(21), Manufacturer_Name=Hirose, Mouser Part Number=798-DF13A10P125H21, Arrow Price/Stock=https://www.arrow.com/en/products/df13a-10p-1.25h-21/hirose-electric, Datasheet Link=https://datasheet.datasheetarchive.com/originals/dk/DKDS-30/590349.pdf, Height=3.75mm, Manufacturer_Part_Number=DF13A-10P-1.25H(21), Mouser Price/Stock=https://www.mouser.co.uk/ProductDetail/Hirose-Connector/DF13A-10P-125H21?qs=XQjbzJWzFPV7pEVOeMnY%2FQ%3D%3D
J600: "Connector", Manufacturer_Name=SAMTEC, Mouser Part Number=200-TSW10808GTRA, Datasheet Link=https://componentsearchengine.com/Datasheets/1/TSW-108-08-G-T-RA.pdf, Height=8.12mm, Manufacturer_Part_Number=TSW-108-08-G-T-RA, Mouser Price/Stock=https://www.mouser.com/Search/Refine.aspx?Keyword=200-TSW10808GTRA
LED201 LED202 LED203: library part CHIPLED0603, "LED", Mouser Price/Stock=https://www.mouser.at/c/optoelectronics/led-lighting/led-emitters/standard-leds-smd/?series=CHIPLED%200603&instock=y
Q600 Q601: library part BC847A,235, "Transistor BJT NPN", Manufacturer_Name=Nexperia, Mouser Part Number=771-BC847A235, Arrow Part Number=BC847A,235, Arrow Price/Stock=https://www.arrow.com/en/products/bc847a235/nexperia, Datasheet Link=http://assets.nexperia.com/documents/data-sheet/BC847_SER.pdf, Height=1.1mm, Manufacturer_Part_Number=BC847A,235, Mouser Price/Stock=https://www.mouser.co.uk/ProductDetail/Nexperia/BC847A235?qs=me8TqzrmIYWeD%252BqPzufrRA%3D%3D
R200 R201 R202 R203 R300 R301 R302 R303 R305 R306 R309 R310 R401 R500 R501 R502 R503 R504 R505 R506 R604 R605 R606 R607 R608 R609: library part R0402, "Resistor", Height=0.4mm
R205 R206 R207 R304 R313 R314 R400 R402 R403 R600 R601 R602 R603 Rfb100 Rfb101: library part R0603, "Resistor", Height=0.55mm
S400: library part SW-SPST, "Switch"
S401: "Switch", Manufacturer_Name="Copal Electronics", Datasheet Link=https://www.nidec-copal-electronics.com/e/catalog/switch/cas.pdf, Height=2.5mm, Manufacturer_Part_Number=CAS-D20A1
SB600 SB601 SB602 SB603 SB604 SB605 SB606 SB607 SB608 SB609: Manufacturer=YAGEO, Manufacturer_Part_Number=RC0603JR-070RL, Package=SB0603, ComponentLink1Description=Datasheet, ComponentLink1URL=http://tunmcdsvn.tun.st.com/Component_Datasheet_Library/Trunk/Resistors/Yageo_Resistor_RC0603-series, ECCN_EU=n/a, ECCN_US=n/a, Internal_Part_Number=MCD-00071, Part_Type=Mechanical, Provided_By=SUBCO, Status=Released
Y400: library part ABM8W-16.0000MHZ-8-B1U-T3, "Crystal or Oscillator", Manufacturer_Name=ABRACON, Mouser Part Number=815-8W16-8B1UT, Arrow Part Number=ABM8W-16.0000MHZ-8-B1U-T3, Arrow Price/Stock=https://www.arrow.com/en/products/abm8w-16.0000mhz-8-b1u-t3/abracon, Datasheet Link=https://abracon.com/Resonators/ABM8W.pdf, Height=0.75mm, Manufacturer_Part_Number=ABM8W-16.0000MHZ-8-B1U-T3, Mouser Price/Stock=https://www.mouser.co.uk/ProductDetail/ABRACON/ABM8W-160000MHZ-8-B1U-T3?qs=5aG0NVq1C4zuwTHNFUIcqw%3D%3D

## Free pads (board coordinates)
  round 6 hole 3.4: 2(3.81,3.81) 2(3.81,52.07) 2(49.53,3.81) 2(49.53,52.07)

## Via types
v1: diameter 0.6, hole 0.3, Top Layer to Bottom Layer, tented both sides, 170 vias
v2: diameter 0.85, hole 0.45, Top Layer to Bottom Layer, tented both sides, 19 vias

## Nets (pads, with @x,y where several pads share a name; then routed paths per layer and width w, separated by ;. In a path a pad name is that pad's centre, name@x,y a point inside that pad or via, vN(x,y) a via of type N, cw(c..) or ccw(c..) an arc to the next point about the centre after c; other vN are vias at no path point)
3V3: C106.2 C200.2 C301.2 C403.1 C405.1 C406.1 C407.1 C408.1 C409.1 C410.1 D200.5 D301.5 D304.5 D500.5 D501.5 D600.5 FB400.1 IC101.2 IC101.4 IC300.5 IC400.1 IC400.16 IC400.32 IC400.48 IC400.64 IC600.1 IC600.12 IC600.13 J200.1 J300.1 J303.1 J304.4 R313.1 R314.1 R400.1 R600.2 S401.1 S401.4 SB600.2 SB602.2 SB604.2 SB606.2 SB608.2 | length 42.7
  Top Layer w0.2: IC600.12 18.542,12.7 19.05,12.7 19.088,12.738 ; C403.1 19.088,12.738 ; IC600.1 19.192,12.842 19.088,12.738
  Top Layer w0.3: C403.1 v1(19.939,11.557) ; J304.4 19.416,5.436 19.416,6.843 v1(19.431,6.858) ; FB400.1 v1(20.955,29.083) ; v1(21.209,6.731) R314.1 ; R313.1 v1(21.209,12.954) ; v1(21.336,24.13) 22.314,24.13 C407.1 23.203,24.092 23.495,24.384 23.495,25.078 23.496,25.079 IC400.32 ; v1(22.225,20.066) R600.2 ; v1(23.368,37.211) 23.368,36.233 C406.1 23.45,36.075 23.45,35.351 23.496,35.305 23.646,35.155 25.967,35.155 25.968,35.154 IC400.16 ; v1(26.543,6.858) 26.558,6.843 26.558,5.436 J303.1 ; IC400.48 33.468,22.504 33.469,22.503 34.533,22.503 34.709,22.328 C410.1 34.69,21.444 34.69,20.339 v1(34.671,20.32) ; IC400.1 C408.1@33.468,36.195 ; C408.1 33.528,36.233 v1(33.528,37.211) ; IC300.5 v1(34.544,15.494) ; IC400.64 36.011,32.579 36.012,32.58 36.012,33.599 36.233,33.82 C409.1 37.129,33.864 38.055,33.864 v1(38.1,33.909) ; v1(40.259,17.653) R400.1 ; v1(41.021,23.114) C301.2 ; v1(45.593,30.861) 45.618,30.836 46.967,30.836 J300.1 ; C200.2 v1(46.736,10.287) ; v1(51.153,34.671) S401.4 ; S401.1 v1(51.153,41.021) ; v1(51.435,10.995) 51.435,11.593 J200.1@51.582,11.74
  Bottom Layer w0.4: v1(16.51,10.16) SB602.2 ; v1(16.51,12.7) SB606.2 ; v1(16.51,17.78) SB608.2 ; v1(16.51,20.32) SB600.2 ; v1(16.51,22.86) SB604.2
  other v1: 26.065,11.049 42.287,14.945 16.51,25.878 40.894,26.386 12.446,36.098 12.446,42.448 25.908,46.482
  other v2: 17.145,43.303 18.288,43.303 19.431,43.296 20.574,43.303 21.717,43.303 17.145,44.45 21.717,44.45 24.13,45.339 17.145,45.593 21.717,45.593 17.145,46.736 18.288,46.736 19.431,46.743 20.574,46.736 21.717,46.736
+5: C100.2 C103.2 C104.2 C105.2 D300.1 IC100.7 IC100.8 IC101.3 J500.10 J502.1 Rfb100.2 SB601.2 SB603.2 SB605.2 SB607.2 SB609.2 | length 8.7
  Top Layer w0.3: v1(33.782,6.985) D300.1
  Top Layer w0.6: v1(6.15,44.233) v1(7.874,44.233)
  Bottom Layer w0.4: v1(12.7,10.16) SB603.2 ; v1(12.7,12.7) SB607.2 ; v1(12.7,17.399) SB609.2 ; v1(12.7,20.32) SB601.2 ; v1(12.7,22.86) SB605.2
  Bottom Layer w0.6: v1(6.15,44.233) v1(7.874,44.233)
  other v1: 32.512,44.704 30.861,45.593 31.877,45.593 29.972,48.006 30.861,48.006 31.877,48.006 32.766,48.006 16.002,50.546 18.034,50.546 16.002,51.689 18.034,51.689 16.002,52.832 16.891,52.832 29.972,53.086 30.861,53.086 31.75,53.086 32.639,53.086 16.891,53.721
A3V3: C404.1 FB400.2 IC400.28 IC400.29 | length 3.5
  Top Layer w0.3: FB400.2 C404.1 22.404,26.58 23.979,26.58 IC400.29 IC400.28
Analog-Supply: J600.20 J600.23 SB604.1 SB605.1 | length 11
  Bottom Layer w0.2: J600.23 7.62,25.4 10.16,25.4
  Bottom Layer w0.3: 10.16,25.4 10.541,25.4 11.311,24.63 SB605.1 SB604.1
AUX-ADC1: C402.2 D600.6 IC400.12 R608.1 | length 23.1
  Top Layer w0.2: IC400.12 27.984,34.583 27.984,35.926 C402.2
  Top Layer w0.3: R608.1 14.986,24.13 15.494,24.638 17.145,24.638 17.46,24.953 D600.6 19.02,25.878 v1(19.05,25.908) ; IC400.12 27.968,32.311 28.194,32.085 v1(28.194,32.004)
  Bottom Layer w0.3: v1(19.05,25.908) 22.098,25.908 v1(28.194,32.004)
AUX-ADC2: C401.2 D600.4 IC400.13 R609.1 | length 21.6
  Top Layer w0.2: C401.2 27.388,35.926 27.388,35.636 27.419,35.605 27.419,34.616 IC400.13
  Top Layer w0.3: R609.1 13.97,26.67 14.096,26.544 14.762,25.878 D600.4 15.71,26.028 15.71,26.632 16.002,26.924 v1(19.05,26.924) ; v1(27.051,32.004) 27.468,32.421 IC400.13
  Bottom Layer w0.3: v1(19.05,26.924) 22.098,26.924 24.546,29.372 24.546,29.499 v1(27.051,32.004)
AUX-GPIO-1: IC600.10 R604.1 | length 8.5
  Top Layer w0.2: R604.1 14.351,8.89 14.605,9.144 14.605,11.938 16.872,14.205 IC600.10
AUX-GPIO-2: IC600.9 R605.1 | length 6
  Top Layer w0.2: R605.1 13.294,11.524 13.683,11.524 16.764,14.605 IC600.9
AUX-GPIO-3: IC600.8 R606.1 | length 5.1
  Top Layer w0.2: R606.1 15.24,13.97 16.275,15.005 IC600.8
AUX-GPIO-4: IC600.7 R607.1 | length 5.1
  Top Layer w0.2: R607.1 14.859,16.51 15.964,15.405 IC600.7
CS_0: D501.4 IC400.14 R503.1 | length 25.2
  Top Layer w0.3: R503.1 9.957,42.977 10.668,43.688 13.081,43.688 13.396,43.373 D501.4 14.067,42.448 14.605,41.91 16.256,41.91 21.971,36.195 21.971,34.544 23.241,33.274 26.67,33.274 26.967,33.571 IC400.14 IC400.14
CS_1: D501.6 IC400.17 R504.1 | length 20.8
  Top Layer w0.3: R504.1 9.982,41.732 10.698,42.448 D501.6 11.646,42.298 11.646,41.694 11.938,41.402 16.002,41.402 21.336,36.068 21.336,34.29 23.046,32.58 23.979,32.58 IC400.17
CS_2: D501.1 IC400.18 R505.1 | length 20.8
  Top Layer w0.3: R505.1 9.906,40.513 10.571,39.848 D501.1 11.646,39.998 11.646,40.602 11.938,40.894 15.748,40.894 20.701,35.941 20.701,34.036 22.658,32.079 IC400.18
CS_bin_0: J500.9 J502.2 R503.2 | length 1.9
  Top Layer w0.3: v1(6.15,42.983) 6.153,42.98 8.006,42.98 R503.2
CS_bin_1: J500.8 J502.3 R504.2 | length 1.9
  Top Layer w0.3: v1(6.15,41.733) R504.2
CS_bin_2: J500.7 J502.4 R505.2 | length 1.9
  Top Layer w0.3: v1(6.15,40.483) 6.165,40.498 7.994,40.498 R505.2
CS_H_range: J500.6 J502.5 R506.2 | length 1.9
  Top Layer w0.3: v1(6.15,39.233) 6.155,39.238 8.004,39.238 R506.2
CS_HRange: D501.3 IC400.22 R506.1 | length 23.3
  Top Layer w0.3: R506.1 9.906,39.243 10.541,38.608 13.121,38.608 13.396,38.883 D501.3 14.635,39.848 v1(15.494,38.989) ; v1(17.145,33.401) 17.145,32.639 19.939,29.845 21.717,29.845 21.951,30.079 IC400.22
  Bottom Layer w0.3: v1(15.494,38.989) 17.145,37.338 v1(17.145,33.401)
DEBUG-LED1: IC400.42 R207.1 | length 7.1
  Top Layer w0.3: IC400.42 30.468,20.332 31.623,19.177 R207.1
DEBUG-LED2: IC400.41 R206.1 | length 6.6
  Top Layer w0.3: IC400.41 29.968,19.816 30.099,19.685 R206.1
DEBUG-LED3: IC400.40 R205.1 | length 7
  Top Layer w0.3: R205.1 28.575,19.192 29.468,20.085 IC400.40
GPIO-LVL-Supply: IC600.11 SB606.1 SB607.1 | length 7.7
  Top Layer w0.2: v1(17.526,12.7) 17.892,13.066 IC600.11
  Bottom Layer w0.4: SB607.1 17.292,14.47 17.526,14.236 v1(17.526,12.7)
GPIO-Supply: J600.2 J600.5 J600.8 J600.11 SB602.1 SB603.1 | length 11
  Bottom Layer w0.2: J600.8 6.477,13.97 7.747,12.7 10.16,12.7
  Bottom Layer w0.3: 10.16,12.7 10.795,12.7 11.565,11.93 SB603.1 SB602.1
IO-GPIO-1: IC400.37 IC600.2 | length 14.8
  Top Layer w0.2: IC600.2 21.236,14.205 22.398,15.367 24.303,15.367 26.6,17.664 26.6,20.193 27.968,21.561 IC400.37
IO-GPIO-2: IC400.36 IC600.3 | length 14.1
  Top Layer w0.2: IC600.3 21.07,14.605 22.232,15.767 24.137,15.767 26.2,17.83 26.2,20.255 27.468,21.523 IC400.36
IO-GPIO-3: IC400.35 IC600.4 | length 13.4
  Top Layer w0.2: IC600.4 20.905,15.005 22.067,16.167 23.972,16.167 25.8,17.995 25.8,20.318 26.968,21.486 IC400.35
IO-GPIO-4: IC400.34 IC600.5 | length 12.7
  Top Layer w0.2: IC600.5 20.739,15.405 21.901,16.567 23.806,16.567 25.4,18.161 25.4,20.38 26.468,21.448 IC400.34
IO-I2C-SCL: D304.3 IC400.38 R309.1 R314.2 | length 21.6
  Top Layer w0.3: R309.1 19.169,8.501 19.8,9.132 R314.2 22.594,9.132 23.04,9.578 23.04,9.949 23.19,10.099 D304.3 23.615,10.249 24.219,10.249 24.511,10.541 24.511,14.859 27.178,17.526 27.178,19.558 28.468,20.848 IC400.38
IO-I2C-SDA: D304.1 IC400.39 R310.1 R313.2 | length 23.1
  Top Layer w0.3: R310.1 16.891,9.271 17.272,9.652 18.796,9.652 19.697,10.553 R313.2 21.484,10.828 22.004,10.828 22.352,11.176 22.352,11.684 22.517,11.849 23.315,11.849 D304.1 23.465,13.686 v1(23.749,13.97) ; v1(25.4,13.97) 25.4,14.986 27.686,17.272 27.686,19.304 28.968,20.586 IC400.39
  Bottom Layer w0.3: v1(23.749,13.97) v1(25.4,13.97)
IO-SBUS-RX: IC400.33 Q601.3 R600.1 | length 6.1
  Top Layer w0.3: Q601.3 20.156,22.473 22.219,22.473 R600.1 23.61,22.467 24.234,23.091 IC400.33
IO-SBUS-TX: IC400.30 R603.2 | length 11.3
  Top Layer w0.3: R603.2 23.876,17.907 24.384,18.415 v1(24.384,20.066) ; IC400.30 25.356,26.079 v1(25.781,25.654)
  Bottom Layer w0.3: v1(24.384,20.066) 25.781,21.463 v1(25.781,25.654)
IO-SPI-MISO: D301.1 IC400.53 R301.1 | length 10.1
  Top Layer w0.3: IC400.53 38.001,27.079 38.862,27.94 41.518,27.94 41.694,28.116 41.694,28.836 D301.1 42.69,28.986 43.355,28.321 R301.1
IO-SPI-MOSI: D301.3 IC400.54 R300.1 | length 10.7
  Top Layer w0.3: IC400.54 37.358,27.579 38.765,28.986 D301.3 39.944,30.038 40.259,30.353 42.291,30.353 43.053,29.591 R300.1
IO-SPI-NCS: D301.4 IC400.51 R303.1 | length 10.2
  Top Layer w0.3: IC400.51 38.779,26.079 39.086,26.386 D301.4 39.944,25.461 40.386,25.019 42.545,25.019 43.307,25.781 R303.1
IO-SPI-SCL: D301.6 IC400.52 R302.1 | length 9.9
  Top Layer w0.3: IC400.52 38.39,26.579 39.122,27.311 41.523,27.311 41.594,27.24 41.694,27.14 41.694,26.536 D301.6 42.693,26.386 43.358,27.051 R302.1
IO-UART-RX: D304.6 IC400.44 R306.1 | length 18.5
  Top Layer w0.3: D304.6 D304.6@26.34,11.999 ; v1(27.051,13.208) 26.49,12.647 26.49,12.149 D304.6@26.34,11.999 ; R306.1 29.083,9.271 27.432,10.922 27.432,11.557 26.99,11.999 D304.6@26.34,11.999 ; v1(31.242,21.082) 31.468,21.308 IC400.44
  Bottom Layer w0.3: v1(27.051,13.208) 31.242,17.399 v1(31.242,21.082)
IO-UART-TX: D304.4 IC400.43 R305.1 | length 23.4
  Top Layer w0.3: v1(26.67,14.732) 26.67,14.097 25.019,12.446 25.019,10.541 25.311,10.249 25.915,10.249 D304.4 26.065,9.368 26.932,8.501 R305.1 ; v1(30.607,25.273) 30.968,24.912 IC400.43
  Bottom Layer w0.3: v1(26.67,14.732) 26.67,21.336 v1(30.607,25.273)
MISO_H: D500.1 IC400.20 R501.1 | length 17.5
  Top Layer w0.3: R501.1 9.703,34.239 10.444,33.498 D500.1 11.646,33.648 11.646,34.252 11.938,34.544 17.907,34.544 21.372,31.079 IC400.20
MOSI_H: D500.6 IC400.21 R502.1 | length 19.4
  Top Layer w0.3: R502.1 9.957,35.484 10.571,36.098 D500.6 11.646,35.948 11.646,35.344 11.938,35.052 18.669,35.052 v1(19.177,34.544) ; v1(20.574,30.607) 20.602,30.579 IC400.21
  Bottom Layer w0.3: v1(19.177,34.544) 19.177,32.004 v1(20.574,30.607)
NetC100_1: C100.1 IC100.9 Rfb100.1 Rfb101.2 | length 5
  Top Layer w0.3: C100.1 34.963,46.051 Rfb100.1 ; IC100.9 35.019,46.207 Rfb100.1 ; Rfb101.2 Rfb100.1
NetC101_2: C101.2 C102.2 D100.1 IC100.1 IC100.2 IC100.14
  other v1: 40.259,48.006 41.148,48.006 42.037,48.006 42.926,48.006 40.259,53.086 41.148,53.086 42.037,53.086 42.926,53.086
NetC300_2: C300.2 J301.6 J301.7 J301.8 J301.9 J301.10 J301.11 R304.2
NetCL401_2: CL401.2 R401.1 Y400.3 | length 3.7
  Top Layer w0.2: CL401.2 30.14,39.586 30.607,39.119 30.607,38.092 R401.1
NetD300_2: D300.2 J301.1 | length 4
  Top Layer w0.3: D300.2 38.227,6.985 38.451,6.761 J301.1
NetJ200_2: J200.2 R200.1 | length 2.1
  Top Layer w0.3: R200.1 J200.2
NetJ200_4: J200.4 R201.1 | length 2.1
  Top Layer w0.3: R201.1 J200.4
NetJ200_6: J200.6 R202.1 | length 2.1
  Top Layer w0.3: R202.1 J200.6
NetJ200_10: J200.10 R203.1 | length 2.1
  Top Layer w0.3: R203.1 J200.10
NetJ300_2: J300.2 R300.2 | length 1.9
  Top Layer w0.3: R300.2 45.092,29.576 46.977,29.576 J300.2
NetJ300_3: J300.3 R301.2 | length 1.9
  Top Layer w0.3: R301.2 45.082,28.316 46.987,28.316 J300.3
NetJ300_4: J300.4 R302.2 | length 1.9
  Top Layer w0.3: R302.2 45.082,27.056 46.987,27.056 J300.4
NetJ300_5: J300.5 R303.2 | length 1.9
  Top Layer w0.3: R303.2 45.092,25.796 46.977,25.796 J300.5
NetJ300_MP1: J300.MP1 J300.MP2
NetJ303_2: J303.2 R305.2 | length 2.1
  Top Layer w0.3: R305.2 27.818,7.496 27.818,5.426 J303.2
NetJ303_3: J303.3 R306.2 | length 2.1
  Top Layer w0.3: J303.3 29.078,5.426 29.078,7.496 R306.2
NetJ303_MP1: J303.MP1 J303.MP2
NetJ304_2: J304.2 R310.2 | length 2.1
  Top Layer w0.3: R310.2 16.896,7.496 16.896,5.426 J304.2
NetJ304_3: J304.3 R309.2 | length 2.1
  Top Layer w0.3: J304.3 18.156,5.426 18.156,7.496 R309.2
NetJ304_MP1: J304.MP1 J304.MP2
NetJ500_MP1: J500.MP1 J500.MP2
NetJ502_MP1: J502.MP1 J502.MP2
NetJ600_1: J600.1 R604.2 | length 3.3
  Top Layer w0.3: J600.1 R604.2
NetJ600_4: J600.4 R605.2 | length 3.3
  Top Layer w0.3: J600.4 R605.2
NetJ600_7: J600.7 R606.2 | length 3.3
  Top Layer w0.3: J600.7 R606.2
NetJ600_10: J600.10 R607.2 | length 3.3
  Top Layer w0.3: J600.10 R607.2
NetJ600_19: J600.19 R608.2 | length 3.3
  Top Layer w0.3: J600.19 R608.2
NetJ600_22: J600.22 R609.2 | length 3.3
  Top Layer w0.3: J600.22 R609.2
NetLED201_2: LED201.2 R205.2 | length 1.5
  Top Layer w0.3: LED201.2 R205.2
NetLED202_2: LED202.2 R206.2 | length 1.5
  Top Layer w0.3: LED202.2 R206.2
NetLED203_2: LED203.2 R207.2 | length 1.5
  Top Layer w0.3: LED203.2 R207.2
NetQ600_1: Q600.1 R603.1 | length 1.5
  Top Layer w0.3: Q600.1 21.536,17.973 R603.1
NetQ601_1: Q601.1 R602.1 | length 5.6
  Top Layer w0.3: R602.1 16.51,21.59 17.575,22.655 17.575,23.279 17.725,23.429 Q601.1
NetR402_1: R402.1 S401.2 | length 5.2
  Top Layer w0.3: R402.1 45.708,38.354 49.149,38.354 49.403,38.608 S401.2
NetR403_1: R403.1 S401.5 | length 5.2
  Top Layer w0.3: R403.1 45.708,37.338 49.149,37.338 49.403,37.084 S401.5
PGND: C101.1 C102.1 C103.1 C104.1 C105.1 C106.1 C200.1 C300.1 C301.1 C400.2 C401.1 C402.1 C403.2 C404.2 C405.2 C406.2 C407.2 C408.2 C409.2 C410.2 CL400.1 CL401.1 D200.2 D301.2 D304.2 D500.2 D501.2 D600.2 IC100.3 IC100.6 IC100.10 IC100.13 IC100.15 IC100.16 IC100.17 IC101.1 IC300.2 IC400.15 IC400.27 IC400.31 IC400.47 IC400.63 IC600.6 J200.3 J200.5 J200.9 J300.6 J301.5 J303.4 J304.1 J500.1 J500.4 J502.7 J502.10 J600.3 J600.6 J600.9 J600.12 J600.15 J600.18 J600.21 J600.24 LED201.1 LED202.1 LED203.1 P101.1 pad.2 Q600.2 Q601.2 R304.1 Rfb101.1 S400.1 S400.4 S401.3 S401.6 Y400.2 Y400.4 | length 67.8
  Top Layer w0.2: Q601.2 18.016,21.463 v1(19.05,21.463) ; IC600.6 v1(18.542,16.256) ; v1(19.05,19.939) 20.084,19.939 Q600.2 ; C401.1 v1(27.178,37.719) ; C402.1 v1(28.194,37.719) ; IC400.47 33.017,23.042 33.017,21.555 C410.2
  Top Layer w0.3: v1(15.621,6.858) 15.636,6.843 15.636,5.436 J304.1 ; C403.2@17.507,11.576 C403.2 17.507,11.538 17.507,10.433 v1(17.526,10.414) ; v1(21.336,25.146) 21.336,25.516 21.512,25.692 C407.2 22.464,25.58 23.979,25.58 IC400.31 ; v1@22.371,29.102 v1(22.352,29.083) C404.2 22.552,28.232 22.672,28.112 22.672,27.755 22.848,27.579 IC400.27 ; v1(24.892,37.211) 24.892,36.233 C406.2 24.93,36.061 25.05,35.941 26.113,35.941 26.467,35.587 IC400.15 IC400.15 ; CL401.1 v1(28.321,41.91) ; v1(28.575,11.049) LED201.1 ; Y400.2 v1(30.015,42.164) ; v1(30.099,11.049) LED202.1 ; J303.4 30.338,5.436 30.338,6.843 v1(30.353,6.858) ; v1(31.623,11.049) LED203.1 ; v1(32.215,38.608) Y400.4 ; C410.2 33.147,21.425 33.147,20.828 v1(33.655,20.32) ; v1(33.909,38.927) CL400.1 ; IC300.2 v1(34.544,12.827) ; v1(35.052,37.211) 35.052,36.233 C408.2 ; IC400.63 IC400.63 36.133,32.08 36.338,32.08 36.393,32.135 36.999,32.135 37.192,32.328 38.043,32.328 v1(38.1,32.385) ; v1(37.719,37.211) 37.719,36.233 C400.2 ; v1(40.64,5.715) 41.051,5.304 J301.5 ; S400.4 42.037,18.555 v1(42.037,17.526) ; R304.1 v1(42.799,9.144) ; v1(43.434,10.287) C200.1 ; C301.1 v1(44.323,23.114) ; C300.1 v1(44.196,9.144) ; S400.1 45.4,18.542 v1(46.482,18.542) ; v1(45.593,24.511) 45.618,24.536 46.967,24.536 J300.6 ; v1(47.625,41.021) 47.625,39.724 S401.3 ; S401.6 47.668,35.981 v1(47.668,34.671) ; v1(51.435,17.595) 51.435,16.967 J200.9@51.582,16.82
  Top Layer w0.6: v1(6.15,32.983) v1(7.935,32.983) ; v1(27.305,39.243) v1(27.305,41.148) v1(27.305,43.053) v1(29.21,43.053) v1(31.115,43.053) v1(33.02,43.053) v1(34.925,43.053) v1(34.925,41.148) v1(34.925,39.243) ; v1(29.845,36.576) v1(29.845,38.227) ; J200.3@51.582,13.01 51.491,13.01 51.466,13.035 51.466,14.255 51.491,14.28 J200.5@51.582,14.28
  Bottom Layer w0.6: v1(6.15,32.983) v1(7.935,32.983)
  other v1: 23.465,11.049 42.287,12.345 51.466,13.649 16.51,28.478 40.894,28.986 12.446,33.498 6.15,36.733 12.446,39.848 35.56,49.657 36.449,49.657 37.338,49.657 25.908,49.784 30.861,50.546 31.75,50.546 32.639,50.546 33.528,50.546 34.674,50.546 35.56,50.546 36.449,50.546 37.338,50.546 38.224,50.546 39.37,50.546 40.259,50.546 41.148,50.546 42.037,50.546 35.56,51.435 36.449,51.435 37.338,51.435
  other v2: 22.86,50.927 24.13,50.927 22.86,52.197 22.098,53.34
SBUS-LVL-Supply: R601.2 SB608.1 SB609.1 | length 5.2
  Top Layer w0.3: R601.2 v1(14.351,19.05)
  Bottom Layer w0.3: SB609.1 14.351,19.55 ; v1(14.351,19.05) 14.351,19.55 ; SB608.1 14.351,19.55
SBUS-RX: J600.16 R602.2 | length 3.1
  Top Layer w0.3: J600.16 R602.2
SBUS-Supply: J600.14 J600.17 SB600.1 SB601.1 | length 11.9
  Bottom Layer w0.2: J600.17 7.62,20.32 10.16,20.32
  Bottom Layer w0.3: 10.16,20.32 10.922,20.32 11.176,20.574 11.176,21.336 11.93,22.09 SB601.1 SB600.1
SBUS-TX: J600.13 Q600.3 R601.1 | length 10.2
  Top Layer w0.2: R601.1 11.938,19.038 11.938,18.288 12.065,18.161 15.494,18.161 16.256,18.923 Q600.3
  Top Layer w0.3: J600.13 R601.1
SCLK_H: D500.4 IC400.19 R500.1 | length 18.8
  Top Layer w0.3: R500.1 12.446,37.973 13.396,37.023 D500.4 14.067,36.098 14.223,35.942 14.605,35.56 19.284,35.56 20.008,34.836 20.008,33.713 22.142,31.579 IC400.19
SPI.MISO: J500.2 J502.9 R501.2 | length 1.9
  Top Layer w0.3: v1(6.15,34.233) 6.153,34.236 8.006,34.236 R501.2
SPI.MOSI: J500.3 J502.8 R502.2 | length 1.9
  Top Layer w0.3: v1(6.15,35.483) R502.2
SPI.SCK: J500.5 J502.6 R500.2 | length 1.9
  Top Layer w0.3: v1(6.15,37.983) 6.155,37.978 8.004,37.978 R500.2
STM32-SW-AUX: IC400.62 R402.2 | length 13.6
  Top Layer w0.3: IC400.62 39.707,31.579 41.656,33.528 41.656,37.338 42.926,38.608 R402.2
STM32-SW-BOOT: IC400.61 R403.2 | length 12.8
  Top Layer w0.3: IC400.61 40.223,31.079 42.418,33.274 42.418,36.322 43.18,37.084 R403.2
STM32-XC-IN: CL400.2 IC400.5 Y400.1 | length 9.1
  Top Layer w0.2: IC400.5 31.468,38.382 31.115,38.735 31.115,40.386 31.44,40.711 31.74,40.711 Y400.1 CL400.2
STM32-XC-OUT: IC400.6 R401.2 | length 2.5
  Top Layer w0.2: R401.2 30.768,36.965 30.968,36.765 IC400.6
SWD.NRESET: C400.1 D200.6 IC400.7 R203.2 R400.2 S400.2 S400.3 | length 43.5
  Top Layer w0.3: IC400.7 30.468,33.286 30.988,32.766 33.909,32.766 36.157,35.014 C400.1 36.195,36.233 v1(36.195,37.211) ; v1(38.862,20.066) 38.874,20.054 R400.2 43.805,20.054 ; D200.6 41.337,16.191 41.966,16.82 43.781,16.82 ; R203.2 43.781,16.82 ; S400.2 45.338,20.054 43.805,20.054 ; 43.781,16.82 43.781,20.031 43.805,20.054
  Bottom Layer w0.3: v1(36.195,37.211) 36.195,22.733 v1(38.862,20.066)
SWD.SWDCLK: D200.3 IC400.50 R201.2 | length 20.9
  Top Layer w0.3: IC400.50 36.778,25.579 37.592,24.765 37.592,15.875 40.132,13.335 43.061,13.335 43.237,13.159 D200.3@43.237,12.55 ; D200.3 D200.3@43.237,12.55 ; R201.2 44.379,13.01 44.069,12.7 43.387,12.7 D200.3@43.237,12.55
SWD.SWDIO: D200.1 IC400.49 R200.2 | length 21.6
  Top Layer w0.3: IC400.49 35.457,25.078 36.517,25.078 36.83,24.765 36.83,15.367 39.852,12.345 D200.1 41.337,11.368 41.529,11.176 43.648,11.176 44.212,11.74 R200.2
SWD.SWO: D200.4 IC400.56 R202.2 | length 24.6
  Top Layer w0.3: v1(33.655,27.94) 34.294,28.579 IC400.56 ; v1(38.608,17.145) 38.608,15.748 40.386,13.97 42.911,13.97 43.087,14.146 43.087,14.795 D200.4 43.237,14.67 43.387,14.52 44.027,14.52 44.267,14.28 R202.2
  Bottom Layer w0.3: v1(33.655,27.94) 33.655,23.368 38.608,18.415 v1(38.608,17.145)
USB-CON_N: IC300.1 J301.2 | length 11.2
  Top Layer w0.3: IC300.1 33.594,10.813 35.771,8.636 37.735,8.636 39.276,7.095 39.276,5.969 39.101,5.794 J301.2
USB-CON_P: IC300.3 J301.3 | length 10.7
  Top Layer w0.3: IC300.3 35.494,10.661 35.269,10.436 35.269,9.742 35.948,9.063 37.912,9.063 39.703,7.272 39.703,4.247 J301.3
USB-MCU.USBD_N: IC300.6 IC400.45 | length 10
  Top Layer w0.261: IC400.45 31.986,23.073 31.986,20.338 34.312,18.012 34.312,16.23 33.594,15.512 IC300.6
USB-MCU.USBD_P: IC300.4 IC400.46 | length 10
  Top Layer w0.261: IC400.46 32.45,23.073 32.45,20.53 34.776,18.204 34.776,16.23 35.494,15.512 IC300.4
VBat: D100.2 P100.1 | length 4.5
  Top Layer w1: D100.2 46.99,43.9 47.075,43.815 50.673,43.815 P100.1@51.435,43.815
pads on no net: D500.3 D600.1 D600.3 IC100.4 IC100.5 IC100.11 IC100.12 IC400.2 IC400.3 IC400.4 IC400.8 IC400.9 IC400.10 IC400.11 IC400.23 IC400.24 IC400.25 IC400.26 IC400.55 IC400.57 IC400.58 IC400.59 IC400.60 J200.7 J200.8 J301.4

## Polygon pours and split planes (outlines as drawn)
NetC101_2 on Mid Layer 2 (solid, pour order 20): 38.344,47.846 40.089,46.101 44.577,46.101 44.577,54.991 40.089,54.991 38.344,53.246 38.344,51.846 38.844,51.846 39.576,52.578 42.545,52.578 42.545,48.514 39.576,48.514 38.844,49.246 38.344,49.246
3V3 on Mid Layer 2 "3V3_L03_P023" (solid, pour order 23): 53.34,0 46.482,0 46.482,9.144 34.544,9.144 32.766,7.366 32.766,3.302 31.75,2.286 10.414,2.286 10.414,7.366 15.494,7.366 15.494,28.194 10.414,28.194 10.414,48.006 27.686,48.006 27.686,41.91 53.34,41.91
+5 on Mid Layer 2 "+5_L03_P021" (solid, pour order 21): 10.16,2.032 31.75,2.032 33.02,3.302 33.02,7.366 34.544,8.89 46.228,8.89 46.228,0 0,0 0,55.88 53.34,55.88 53.34,42.164 27.94,42.164 27.94,48.26 10.16,48.26 10.16,27.94 15.24,27.94 15.24,7.62 10.16,7.62
PGND on Mid Layer 1 "PGND_L02_P002" (solid, pour order 2): 0,0 0,55.88 53.34,55.88 53.34,0
PGND on Top Layer "PGND_L01_P032" (solid, pour order 32): 0,55.88 53.34,55.88 53.34,0 0,0
NetJ300_MP1 on Top Layer "NETJ300_MP1_L01_P029" (solid, pour order 29): 49.192,21.511 53.34,21.511 53.34,33.861 49.192,33.861
3V3 on Top Layer "3V3_L01_P028" (solid, pour order 28): 15.367,42.672 22.987,42.672 27.051,46.736 27.051,48.006 23.114,48.006 21.209,49.911 20.193,49.911 20.193,52.197 18.669,52.197 18.669,49.911 15.367,49.911
PGND on Top Layer "PGND_L01_P027" (solid, pour order 27): 21.281,50.106 23.127,48.26 27.051,48.26 27.051,49.911 23.031,53.931 22.712,54.25 20.296,54.25 20.296,50.106
+5 on Top Layer "+5_L01_P026" (solid, pour order 26): 18.566,50.106 18.566,54.25 16.15,54.25 15.367,53.467 15.367,50.106
PGND on Top Layer "PGND_L01_P025" (solid, pour order 25): 27.94,55.88 53.34,55.88 53.34,42.164 27.94,42.164
NetC101_2 on Top Layer (solid, pour order 24): 44.577,47.621 47.575,47.621 47.575,46.361 47.315,46.101 40.089,46.101 38.344,47.846 38.344,49.246 38.844,49.246 39.576,48.514 43.434,48.514 43.434,52.578 39.576,52.578 38.844,51.846 38.344,51.846 38.344,51.996 37.794,52.546 37.444,52.546 37.444,53.246 38.344,53.246 40.089,54.991 44.577,54.991
+5 on Top Layer "+5_L01_P014" (solid, pour order 14): 34.544,49.246 34.044,49.246 33.312,48.514 29.591,48.514 29.591,46.101 31.458,44.234 33.633,44.234 33.838,44.439 33.838,46.601 34.544,47.307 34.544,47.846
+5 on Top Layer "+5_L01_P011" (solid, pour order 11): 34.544,51.846 34.044,51.846 33.312,52.578 29.591,52.578 29.591,54.991 34.036,54.991 34.544,54.483 34.544,53.246
NetJ502_MP1 on Top Layer "NETJ502_MP1_L01_P010" (solid, pour order 10): 0,47.383 3.95,47.383 3.95,29.833 0,29.833
NetJ303_MP1 on Top Layer "NETJ303_MP1_L01_P009" (solid, pour order 9): 23.523,0 23.523,3.221 33.373,3.221 33.373,0
NetJ304_MP1 on Top Layer "NETJ304_MP1_L01_P008" (solid, pour order 8): 12.601,0 12.601,3.221 22.451,3.221 22.451,0
NetC300_2 on Top Layer "NETC300_2_L01_P003" (solid, pour order 3): 34.036,0 34.036,5.969 38.1,5.969 41.021,8.89 44.831,8.89 45.466,8.255 45.466,0
PGND on Bottom Layer "PGND_L04_P031" (solid, pour order 31): 0,55.88 53.34,55.88 53.34,0 0,0
NetJ500_MP1 on Bottom Layer "NETJ500_MP1_L04_P030" (solid, pour order 30): 0,47.383 3.95,47.383 3.95,29.833 0,29.833
Analog-Supply on Bottom Layer "ANALOG-SUPPLY_L04_P007" (solid, pour order 7): 5.08,22.86 10.16,22.86 10.16,27.94 5.08,27.94
SBUS-Supply on Bottom Layer "SBUS-SUPPLY_L04_P006" (solid, pour order 6): 5.08,17.78 10.16,17.78 10.16,22.86 5.08,22.86
GPIO-Supply on Bottom Layer "GPIO-SUPPLY_L04_P005" (solid, pour order 5): 5.08,17.78 10.16,17.78 10.16,7.62 5.08,7.62

## Keep-outs
Keep-Out Layer:
  lines w0.2: 30.468,34.567 30.468,35.572 30.226,35.814 29.337,35.814 28.956,36.195 28.956,37.084 28.956,38.481 27.432,38.481 26.543,38.481 26.543,43.815 35.687,43.815 35.687,38.862 35.052,38.227 33.147,38.227 31.968,37.048 31.968,34.567
  lines w0.254: 0,3.81 ccw(c3.81,3.81) 3.81,0 49.53,0 ccw(c49.53,3.81) 53.34,3.81 53.34,52.07 ccw(c49.53,52.07) 49.53,55.88 3.81,55.88 ccw(c3.81,52.07) 0,52.07 0,3.81

## Other copper
Top Layer:
  pour cut-out: 26.543,43.815 35.687,43.815 35.687,38.862 35.052,38.227 33.147,38.227 31.968,37.048 31.968,34.567 30.468,34.567 30.468,35.572 30.226,35.814 29.337,35.814 28.956,36.195 28.956,38.481 26.543,38.481
Mid Layer 2:
  pour cut-out: 26.543,43.815 35.687,43.815 35.687,38.862 35.052,38.227 33.147,38.227 32.004,37.084 32.004,34.671 30.48,34.671 30.48,35.56 30.226,35.814 29.337,35.814 28.956,36.195 28.956,38.481 26.543,38.481

## Silkscreen, mask and mechanical layers (free items; w line width, h text height)
Bottom Overlay:
  drawing of 29 lines, arcs and shapes, not listed